# EAGLE board headstage (EAGLE 6.5.0), part 1 of 2
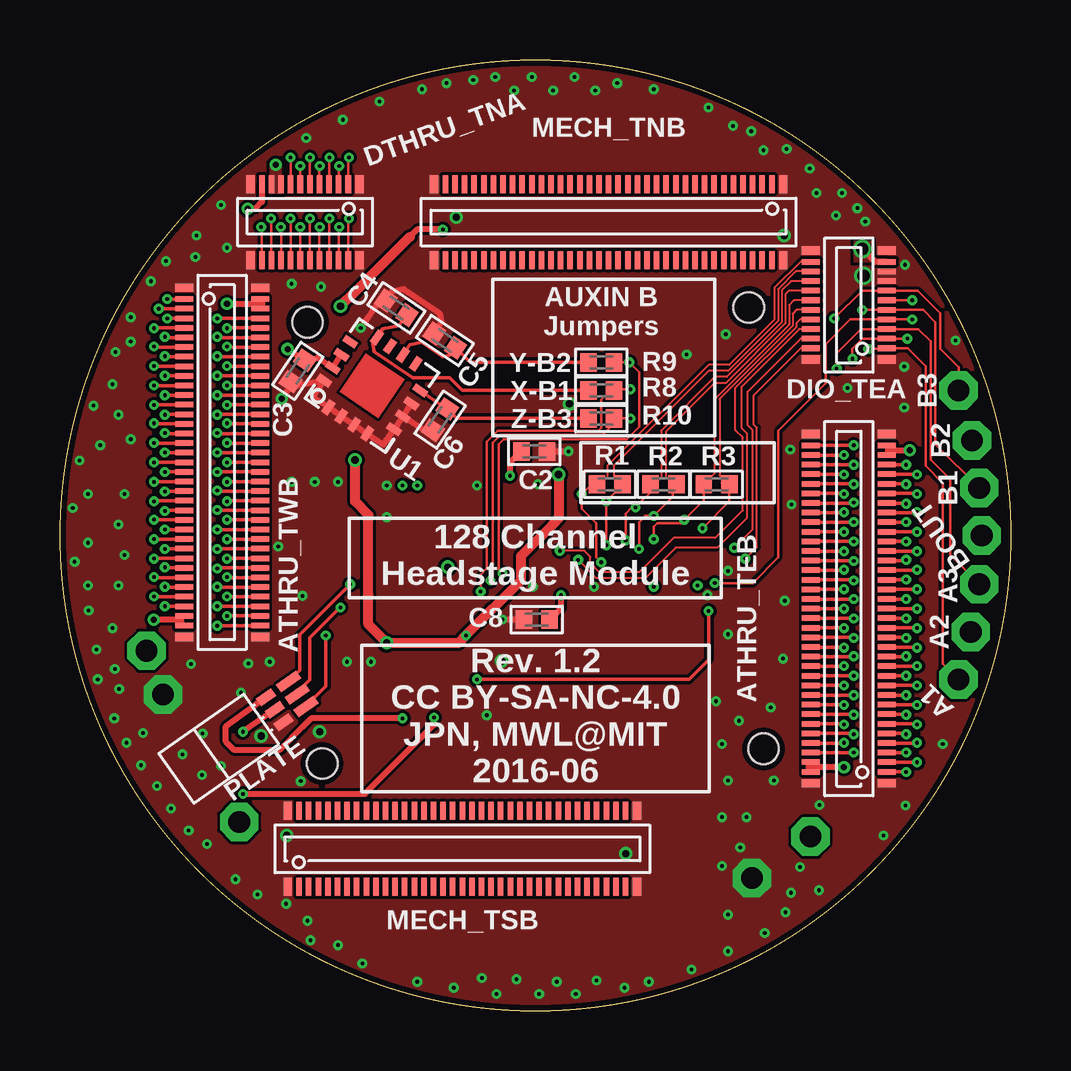
[diagram p0: board, top side]
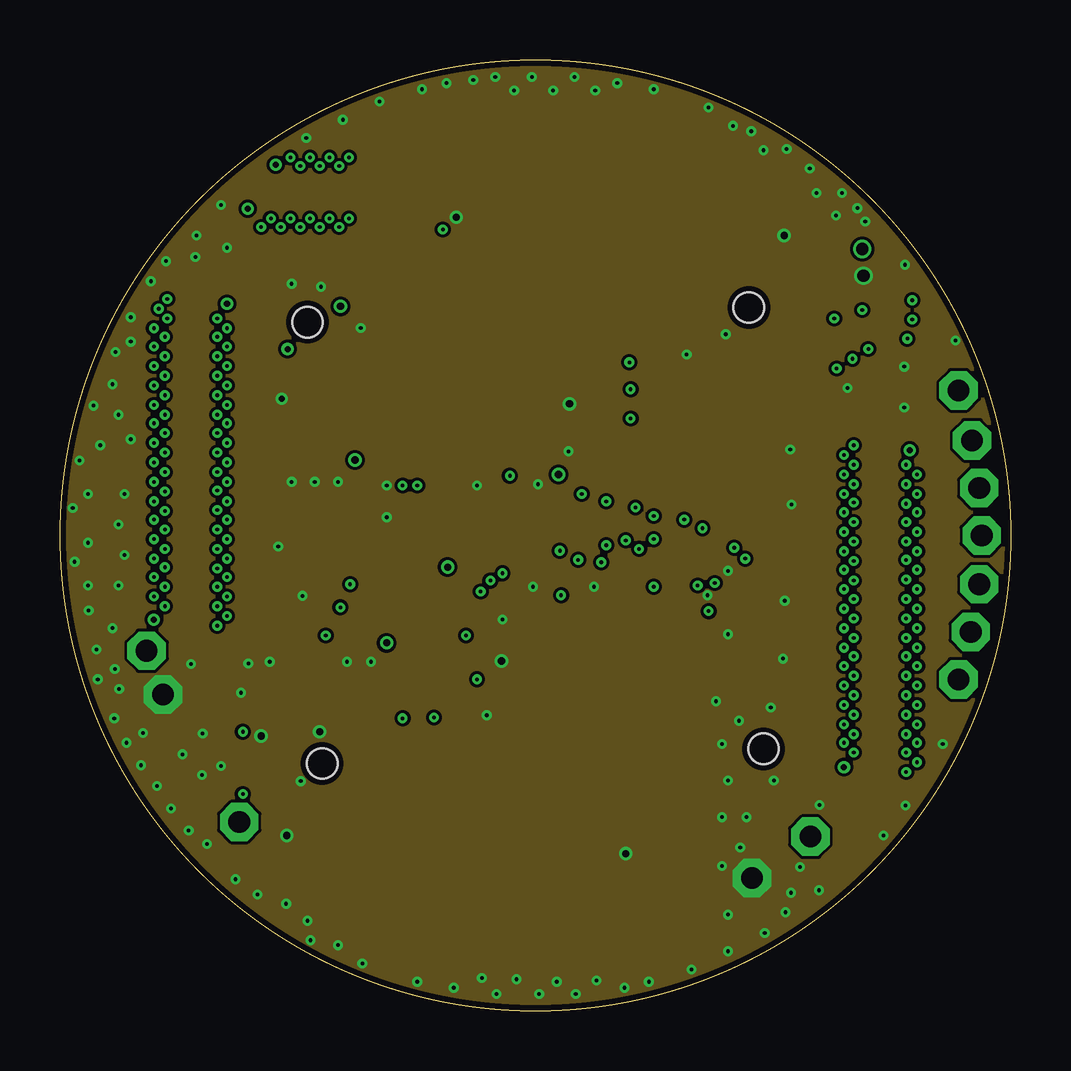
[diagram p1: board, inner layer Route2]
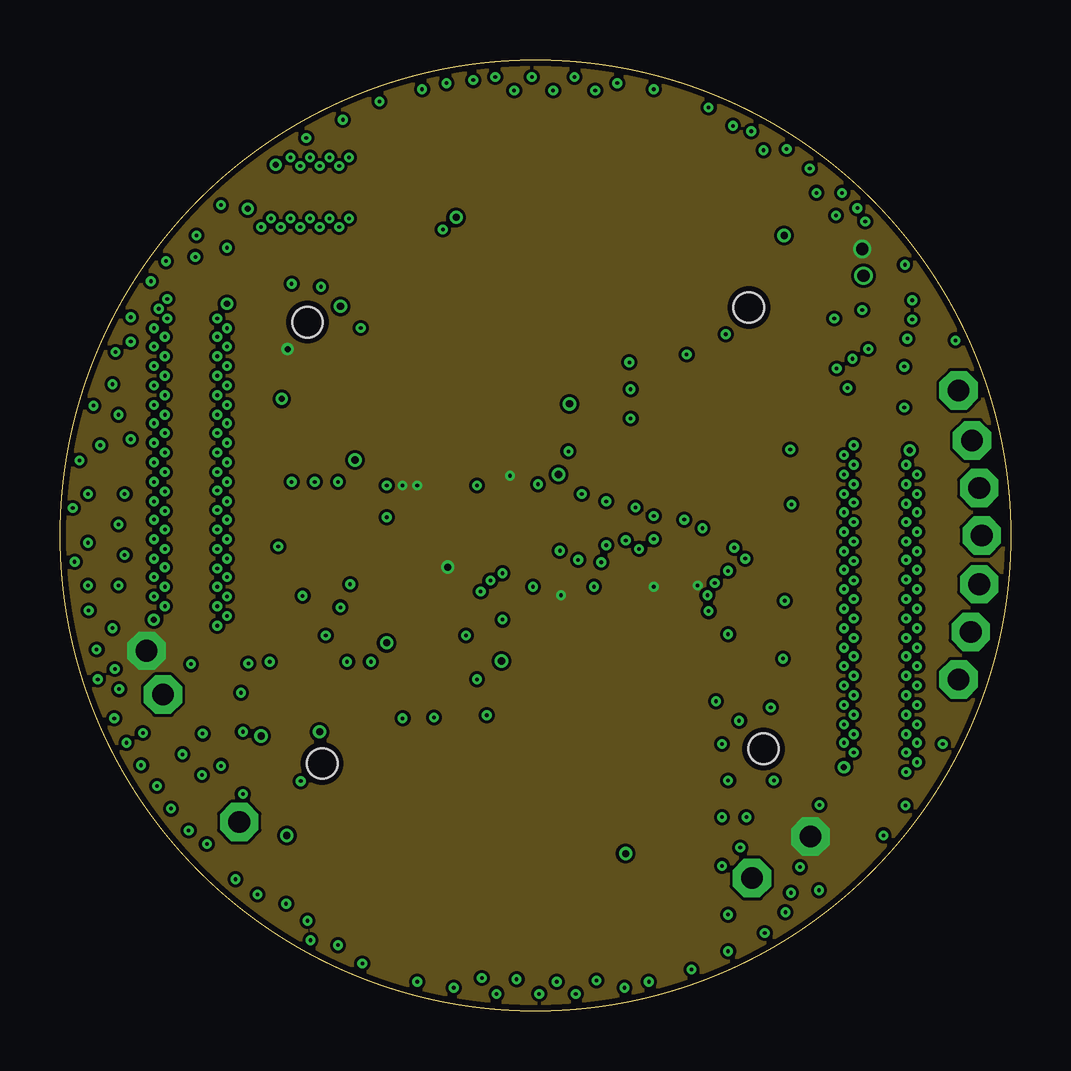
[diagram p2: board, inner layer Route3]
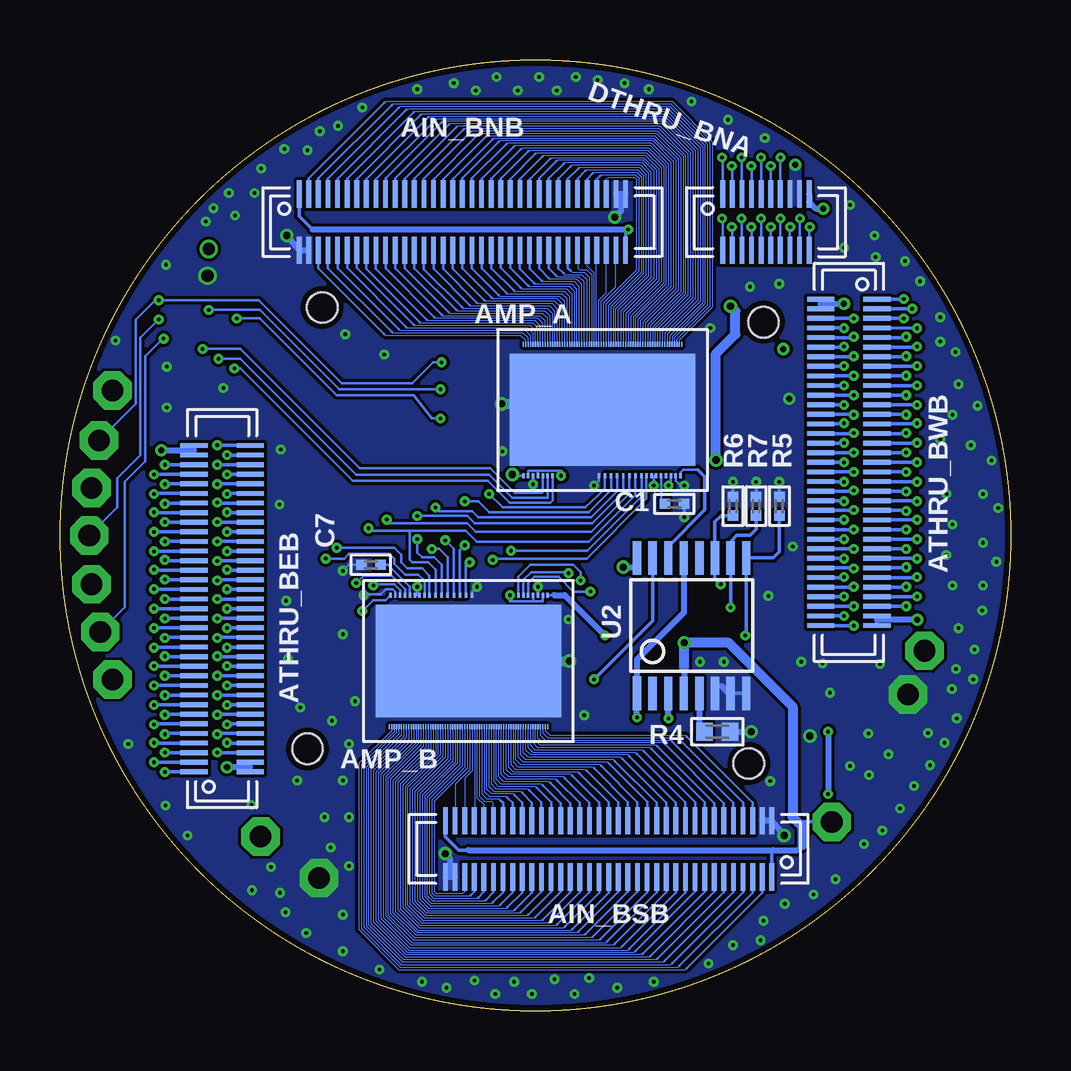
[diagram p3: board, bottom side, seen from below]

Size 39.62 x 39.62 mm. Coordinates in mm from the lower left corner, seen from the top.
Outline: circle at 19.81,19.81 radius 19.81
Copper layers (1*2+3*16): Top 0.035mm / dielectric 1.5mm / Route2 0.035mm / dielectric 0.15mm / Route3 0.035mm / dielectric 0.2mm / Bottom 0.035mm
Design rules "Precision-Image *": minimum track width 2mil, minimum drill 6mil, track to track 0.050290625mm, track to pad 0.050290625mm, pad to pad 0.050290625mm, via to via 0.050290625mm, smd to smd 0.050290625mm, copper to edge 10mil, drill to drill 15mil, minimum pad ring 5mil, minimum via ring 5mil, stop-mask expansion 2mil, vias tented up to drill 20mil, thermal gap 10mil
Net classes: 1 thick: width 0.102 mm
Holes 1.27 mm at 10.31,28.7 28.7,29.31 29.31,10.92 10.92,10.31

## Footprints (pad centres in the part's own frame; a part is rotated, then mirrored left to right if it is on the bottom)
TESTPOINT_SMALL = drill 0.9 pad 1.6 octagon: 1 0,0
DF40-70REC = smd 0.2 x 1.14: 1 -6.8,1.17; 2 -6.4,1.17; 3 -6,1.17; 4 -5.6,1.17; 5 -5.2,1.17; 6 -4.8,1.17; 7 -4.4,1.17; 8 -4,1.17; 9 -3.6,1.17; 10 -3.2,1.17; 11 -2.8,1.17; 12 -2.4,1.17; 13 -2,1.17; 14 -1.6,1.17; 15 -1.2,1.17; 16 -0.8,1.17; 17 -0.4,1.17; 18 0,1.17; 19 0.4,1.17; 20 0.8,1.17; 21 1.2,1.17; 22 1.6,1.17; 23 2,1.17; 24 2.4,1.17; 25 2.8,1.17; 26 3.2,1.17; 27 3.6,1.17; 28 4,1.17; 29 4.4,1.17; 30 4.8,1.17; 31 5.2,1.17; 32 5.6,1.17; 33 6,1.17; 34 6.4,1.17; 35 6.8,1.17; 36 6.8,-1.17; 37 6.4,-1.17; 38 6,-1.17; 39 5.6,-1.17; 40 5.2,-1.17; 41 4.8,-1.17; 42 4.4,-1.17; 43 4,-1.17; 44 3.6,-1.17; 45 3.2,-1.17; 46 2.8,-1.17; 47 2.4,-1.17; 48 2,-1.17; 49 1.6,-1.17; 50 1.2,-1.17; 51 0.8,-1.17; 52 0.4,-1.17; 53 0,-1.17; 54 -0.4,-1.17; 55 -0.8,-1.17; 56 -1.2,-1.17; 57 -1.6,-1.17; 58 -2,-1.17; 59 -2.4,-1.17; 60 -2.8,-1.17; 61 -3.2,-1.17; 62 -3.6,-1.17; 63 -4,-1.17; 64 -4.4,-1.17; 65 -4.8,-1.17; 66 -5.2,-1.17; 67 -5.6,-1.17; 68 -6,-1.17; 69 -6.4,-1.17; 70 -6.8,-1.17
RHD2164_COB = smd 0.051 x 0.203: 0 -3.2,2.743; 1 -3.099,2.743; 2 -2.997,2.743; 3 -2.896,2.743; 4 -2.794,2.743; 5 -2.692,2.743; 6 -2.591,2.743; 7 -2.489,2.743; 8 -2.388,2.743; 9 -2.286,2.743; 10 -2.184,2.743; 11 -2.083,2.743; 12 -1.981,2.743; 13 -1.88,2.743; 14 -1.778,2.743; 15 -1.676,2.743; 16 -1.575,2.743; 17 -1.473,2.743; 18 -1.372,2.743; 19 -1.27,2.743; 20 -1.168,2.743; 21 -1.067,2.743; 22 -0.965,2.743; 23 -0.864,2.743; 24 -0.762,2.743; 25 -0.66,2.743; 26 -0.559,2.743; 27 -0.457,2.743; 28 -0.356,2.743; 29 -0.254,2.743; 30 -0.152,2.743; 31 -0.051,2.743; 32 0.051,2.743; 33 0.152,2.743; 34 0.254,2.743; 35 0.356,2.743; 36 0.457,2.743; 37 0.559,2.743; 38 0.66,2.743; 39 0.762,2.743; 40 0.864,2.743; 41 0.965,2.743; 42 1.067,2.743; 43 1.168,2.743; 44 1.27,2.743; 45 1.372,2.743; 46 1.473,2.743; 47 1.575,2.743; 48 1.676,2.743; 49 1.778,2.743; 50 1.88,2.743; 51 1.981,2.743; 52 2.083,2.743; 53 2.184,2.743; 54 2.286,2.743; 55 2.388,2.743; 56 2.489,2.743; 57 2.591,2.743; 58 2.692,2.743; 59 2.794,2.743; 60 2.896,2.743; 61 2.997,2.743; 62 3.099,2.743; 63 3.2,2.743; A -3.302,2.743; B 3.302,2.743 | smd 0.102 x 0.203: B1 -3.302,-2.743; B2 -3.099,-2.743; B3 -2.896,-2.743; B4 -2.692,-2.743; B5 -2.489,-2.743; B6 -2.286,-2.743; B7 -2.083,-2.743; B8 -0.152,-2.743; B9 0.102,-2.743; B10 0.356,-2.743; B11 0.61,-2.743; B12 0.864,-2.743; B13 1.118,-2.743; B14 1.372,-2.743; B15 1.626,-2.743; B16 1.829,-2.743; B17 2.032,-2.743; B18 2.235,-2.743; B19 2.438,-2.743; B20 2.642,-2.743; B21 2.845,-2.743; B22 3.048,-2.743; B23 3.251,-2.743 | smd 7.722 x 4.674: CENTER 0,0
DF40-70HEAD = smd 0.23 x 0.75: 1 -6.8,-1.585; 2 -6.4,-1.585; 3 -6,-1.585; 4 -5.6,-1.585; 5 -5.2,-1.585; 6 -4.8,-1.585; 7 -4.4,-1.585; 8 -4,-1.585; 9 -3.6,-1.585; 10 -3.2,-1.585; 11 -2.8,-1.585; 12 -2.4,-1.585; 13 -2,-1.585; 14 -1.6,-1.585; 15 -1.2,-1.585; 16 -0.8,-1.585; 17 -0.4,-1.585; 18 0,-1.585; 19 0.4,-1.585; 20 0.8,-1.585; 21 1.2,-1.585; 22 1.6,-1.585; 23 2,-1.585; 24 2.4,-1.585; 25 2.8,-1.585; 26 3.2,-1.585; 27 3.6,-1.585; 28 4,-1.585; 29 4.4,-1.585; 30 4.8,-1.585; 31 5.2,-1.585; 32 5.6,-1.585; 33 6,-1.585; 34 6.4,-1.585; 35 6.8,-1.585; 36 6.8,1.585; 37 6.4,1.585; 38 6,1.585; 39 5.6,1.585; 40 5.2,1.585; 41 4.8,1.585; 42 4.4,1.585; 43 4,1.585; 44 3.6,1.585; 45 3.2,1.585; 46 2.8,1.585; 47 2.4,1.585; 48 2,1.585; 49 1.6,1.585; 50 1.2,1.585; 51 0.8,1.585; 52 0.4,1.585; 53 0,1.585; 54 -0.4,1.585; 55 -0.8,1.585; 56 -1.2,1.585; 57 -1.6,1.585; 58 -2,1.585; 59 -2.4,1.585; 60 -2.8,1.585; 61 -3.2,1.585; 62 -3.6,1.585; 63 -4,1.585; 64 -4.4,1.585; 65 -4.8,1.585; 66 -5.2,1.585; 67 -5.6,1.585; 68 -6,1.585; 69 -6.4,1.585; 70 -6.8,1.585 | smd 0.35 x 0.75: M1 -7.275,-1.585; M2 7.275,-1.585; M3 7.275,1.585; M4 -7.275,1.585
0201 = smd 0.432 x 0.432: 1 -0.394,0; 2 0.394,0
0402 = smd 0.686 x 0.762: 1 -0.533,0; 2 0.533,0
DF40-20HEAD = smd 0.23 x 0.75: 1 -1.8,-1.585; 2 -1.4,-1.585; 3 -1,-1.585; 4 -0.6,-1.585; 5 -0.2,-1.585; 6 0.2,-1.585; 7 0.6,-1.585; 8 1,-1.585; 9 1.4,-1.585; 10 1.8,-1.585; 11 1.8,1.585; 12 1.4,1.585; 13 1,1.585; 14 0.6,1.585; 15 0.2,1.585; 16 -0.2,1.585; 17 -0.6,1.585; 18 -1,1.585; 19 -1.4,1.585; 20 -1.8,1.585 | smd 0.35 x 0.75: M1 -2.275,-1.585; M2 2.275,-1.585; M3 2.275,1.585; M4 -2.275,1.585
DF40-20REC = smd 0.2 x 1.14: 1 -1.8,1.17; 2 -1.4,1.17; 3 -1,1.17; 4 -0.6,1.17; 5 -0.2,1.17; 6 0.2,1.17; 7 0.6,1.17; 8 1,1.17; 9 1.4,1.17; 10 1.8,1.17; 11 1.8,-1.17; 12 1.4,-1.17; 13 1,-1.17; 14 0.6,-1.17; 15 0.2,-1.17; 16 -0.2,-1.17; 17 -0.6,-1.17; 18 -1,-1.17; 19 -1.4,-1.17; 20 -1.8,-1.17
OMNETICS_PZN-06-AA = smd 0.381 x 0.762: B1 0.635,-1.016; B2 0,-1.016; B3 -0.635,-1.016 | smd 0.381 x 1.016: T1 0.635,-2.159; T2 0,-2.159; T3 -0.635,-2.159
ADXL335 = smd 0.61 x 0.305: COM1 -1.775,-0.3; NC1 -1.775,1; NC2 -1.775,-0.95; NC3 1.775,-1; NC4 1.775,0.3; ST -1.775,0.35; XOUT 1.775,0.95; YOUT 1.775,-0.35 | smd 0.305 x 0.61: COM2 -1,-1.775; COM3 -0.35,-1.775; COM4 0.3,-1.775; NC5 1,1.775; NC6 -0.95,1.775; VS1 0.35,1.775; VS2 -0.3,1.775; ZOUT 0.95,-1.775
TSSOP-16 = smd 0.348 x 1.397: 1 -2.273,-2.814; 2 -1.623,-2.815; 3 -0.973,-2.815; 4 -0.323,-2.815; 5 0.327,-2.815; 6 0.977,-2.815; 7 1.627,-2.815; 8 2.277,-2.815; 9 2.277,2.825; 10 1.627,2.825; 11 0.977,2.825; 12 0.327,2.825; 13 -0.323,2.825; 14 -0.973,2.825; 15 -1.623,2.825; 16 -2.273,2.825

## Placement (x,y rotation side)
A1  [TESTPOINT_SMALL]  37.44,13.82 0 top
A2  [TESTPOINT_SMALL]  37.95,15.8 0 top
A3  [TESTPOINT_SMALL]  38.3,17.78 0 top
AIN_BNB  DF40REC  [DF40-70REC]  22.86,32.87 0 bottom
AIN_BSB  DF40REC  [DF40-70REC]  16.76,6.76 180 bottom
AMP_A  RHD2164  [RHD2164_COB]  17.02,25.04 0 bottom
AMP_B  RHD2164  [RHD2164_COB]  22.61,14.58 180 bottom
ATHRU_BEB  DF40REC  [DF40-70REC]  32.87,16.76 90 bottom
ATHRU_BWB  DF40REC  [DF40-70REC]  6.76,22.86 270 bottom
ATHRU_TEB  DF40HEAD  [DF40-70HEAD]  32.87,16.76 90 top
ATHRU_TWB  DF40HEAD  [DF40-70HEAD]  6.76,22.86 270 top
B1  [TESTPOINT_SMALL]  38.3,21.79 0 top
B2  [TESTPOINT_SMALL]  38,23.77 0 top
B3  [TESTPOINT_SMALL]  37.44,25.86 0 top
BOUT  [TESTPOINT_SMALL]  38.4,19.81 0 top
C1  10n  [0201]  14.02,21.13 0 bottom
C2  .1uF  [0402]  19.76,23.32 0 top
C3  .1uF  [0402]  9.91,26.67 236 top
C4  .1uF  [0402]  14.02,29.3 326 top
C5  .1uF  [0402]  16.04,27.93 326 top
C6  .1uF  [0402]  15.84,24.64 56 top
C7  10n  [0201]  26.67,18.59 180 bottom
C8  .1uF  [0402]  19.86,16.31 180 top
DIO_TEA  DF40HEAD  [DF40-20HEAD]  32.87,29.41 90 top
DTHRU_BNA  DF40REC  [DF40-20REC]  10.21,32.87 0 bottom
DTHRU_TNA  DF40HEAD  [DF40-20HEAD]  10.21,32.87 180 top
GND  GND  [TESTPOINT_SMALL]  28.83,5.54 0 top
GND.  GND  [TESTPOINT_SMALL]  4.29,13.18 0 top
MECH_TNB  DF40HEAD  [DF40-70HEAD]  22.86,32.87 180 top
MECH_TSB  DF40HEAD  [DF40-70HEAD]  16.76,6.76 0 top
PLATE  PZN-06  [OMNETICS_PZN-06-AA]  8.11,11.97 125 top
R1  100  [0402]  22.91,21.95 0 top
R2  100  [0402]  25.15,21.95 0 top
R3  100  [0402]  27.36,21.95 0 top
R4  0  [0402]  12.24,11.63 180 bottom
R5  100k  [0201]  9.65,21.03 270 bottom
R6  100k  [0201]  10.62,21.03 270 bottom
R7  100k  [0201]  11.58,21.03 270 bottom
R8  0  [0402]  22.56,25.86 180 top
R9  0  [0402]  22.56,27.03 180 top
R10  0  [0402]  22.56,24.69 180 top
REF1  REF  [TESTPOINT_SMALL]  7.47,7.87 0 top
U1  ADXL335  [ADXL335]  13,26.06 56 top
U2  74HC4053  [TSSOP-16]  13.31,16.05 0 bottom
VCC1  VCC  [TESTPOINT_SMALL]  31.27,7.26 0 top
VCC2  VCC  [TESTPOINT_SMALL]  3.61,15.01 0 top

## Library data of the parts
A1-A3 AIN_BNB AIN_BSB AMP_A AMP_B ATHRU_BEB ATHRU_BWB ATHRU_TEB ATHRU_TWB B1-B3 BOUT C4-C6 DIO_TEA DTHRU_BNA DTHRU_TNA GND GND. MECH_TNB MECH_TSB PLATE R1-R3 R8-R10 REF1 U1 U2 VCC1 VCC2 = jonnew
C1 C2 C7 C8 R4-R7 = RHD2000_eval_board
C3 = headstage

## Nets
AGND_THRU_1: ATHRU_BWB.34 ATHRU_BWB.35 ATHRU_TWB.34 ATHRU_TWB.35
AGND_THRU_2: ATHRU_BWB.69 ATHRU_BWB.70 ATHRU_TWB.69 ATHRU_TWB.70
AGND_THRU_3 [thick]: ATHRU_BEB.34 ATHRU_BEB.35 ATHRU_TEB.34 ATHRU_TEB.35
AGND_THRU_4: ATHRU_BEB.69 ATHRU_BEB.70 ATHRU_TEB.69 ATHRU_TEB.70
AUXIN1_A: A1.1 AMP_A.B5 DIO_TEA.1
AUXIN1_A_THRU: DTHRU_BNA.1 DTHRU_TNA.1
AUXIN1_B: AMP_B.B5 B1.1 DIO_TEA.5 R8.1
AUXIN1_B_THRU: DTHRU_BNA.5 DTHRU_TNA.5
AUXIN2_A: A2.1 AMP_A.B6 DIO_TEA.2
AUXIN2_A_THRU: DTHRU_BNA.2 DTHRU_TNA.2
AUXIN2_B: AMP_B.B6 B2.1 DIO_TEA.6 R9.1
AUXIN2_B_THRU: DTHRU_BNA.6 DTHRU_TNA.6
AUXIN3_A: A3.1 AMP_A.B7 DIO_TEA.3
AUXIN3_A_THRU: DTHRU_BNA.3 DTHRU_TNA.3
AUXIN3_B: AMP_B.B7 B3.1 DIO_TEA.7 R10.1
AUXIN3_B_THRU: DTHRU_BNA.7 DTHRU_TNA.7
AUXOUT_B: AMP_B.B20 BOUT.1 DIO_TEA.4
AUXOUT_B_THRU: DTHRU_BNA.4 DTHRU_TNA.4
BATH [thick]: PLATE.B1 U2.3
CS+: AMP_A.B10 AMP_B.B10 DIO_TEA.12 R1.2
CS+_THRU: DTHRU_BNA.12 DTHRU_TNA.12
CS-: AMP_A.B9 AMP_B.B9 DIO_TEA.11 R1.1
CS-_THRU: DTHRU_BNA.11 DTHRU_TNA.11
ELEC_TEST1: AMP_A.B23 U2.14
ELEC_TEST2: AMP_B.B23 U2.15
GND [thick]: AIN_BNB.34 AIN_BNB.35 AIN_BNB.69 AIN_BNB.70 AIN_BSB.34 AIN_BSB.35 AIN_BSB.69 AIN_BSB.70 AMP_A.B3 AMP_A.B8 AMP_A.B22 AMP_A.CENTER AMP_B.B3 AMP_B.B8 AMP_B.B22 AMP_B.CENTER ATHRU_TEB.M1 ATHRU_TEB.M2 ATHRU_TEB.M3 ATHRU_TEB.M4 ATHRU_TWB.M1 ATHRU_TWB.M2 ATHRU_TWB.M3 ATHRU_TWB.M4 C1.2 C2.2 C3.2 C4.1 C5.1 C6.1 C7.2 C8.2 DIO_TEA.8 DIO_TEA.9 DIO_TEA.M1 DIO_TEA.M2 DIO_TEA.M3 DIO_TEA.M4 DTHRU_TNA.M1 DTHRU_TNA.M2 DTHRU_TNA.M3 DTHRU_TNA.M4 GND.1 GND..1 MECH_TNB.M1 MECH_TNB.M2 MECH_TNB.M3 MECH_TNB.M4 MECH_TSB.M1 MECH_TSB.M2 MECH_TSB.M3 MECH_TSB.M4 PLATE.B3 R4.1 R5.1 R6.1 R7.1 U1.COM1 U1.COM2 U1.COM3 U1.COM4 U1.NC1 U1.NC2 U1.NC6 U1.ST U2.6 U2.7 U2.8
GND_THRU: DTHRU_BNA.8 DTHRU_BNA.9 DTHRU_TNA.8 DTHRU_TNA.9
MISO1+: AMP_A.B16 DIO_TEA.18
MISO1+_THRU: DTHRU_BNA.18 DTHRU_TNA.18
MISO1-: AMP_A.B15 DIO_TEA.17
MISO1-_THRU: DTHRU_BNA.17 DTHRU_TNA.17
MISO2+: AMP_B.B16 DIO_TEA.20
MISO2+_THRU: DTHRU_BNA.20 DTHRU_TNA.20
MISO2-: AMP_B.B15 DIO_TEA.19
MISO2-_THRU: DTHRU_BNA.19 DTHRU_TNA.19
MOSI+: AMP_A.B14 AMP_B.B14 DIO_TEA.16 R3.2
MOSI+_THRU: DTHRU_BNA.16 DTHRU_TNA.16
MOSI-: AMP_A.B13 AMP_B.B13 DIO_TEA.15 R3.1
MOSI-_THRU: DTHRU_BNA.15 DTHRU_TNA.15
N$1 [thick]: AMP_B.B19 C7.1
N$2: AIN_BNB.38 AMP_A.30
N$3: AIN_BNB.39 AMP_A.29
N$4: AIN_BNB.40 AMP_A.28
N$5: AIN_BNB.41 AMP_A.27
N$6: AIN_BNB.42 AMP_A.26
N$7: AIN_BNB.32 AMP_A.33
N$8: AIN_BNB.31 AMP_A.34
N$9: AIN_BNB.30 AMP_A.35
N$10: AIN_BNB.29 AMP_A.36
N$11: AIN_BSB.38 AMP_B.30
N$12: AIN_BNB.28 AMP_A.37
N$13: AIN_BNB.27 AMP_A.38
N$14: AIN_BNB.26 AMP_A.39
N$15: AIN_BNB.25 AMP_A.40
N$16: AIN_BNB.24 AMP_A.41
N$17: AIN_BNB.23 AMP_A.42
N$18: AIN_BNB.22 AMP_A.43
N$19: AIN_BNB.21 AMP_A.44
N$20: AIN_BNB.20 AMP_A.45
N$21: AIN_BNB.19 AMP_A.46
N$22: AIN_BNB.18 AMP_A.47
N$23: AIN_BNB.17 AMP_A.48
N$24: AIN_BNB.16 AMP_A.49
N$25: AIN_BNB.15 AMP_A.50
N$26: AIN_BNB.14 AMP_A.51
N$27: AIN_BNB.13 AMP_A.52
N$28: AIN_BNB.12 AMP_A.53
N$29: AIN_BNB.11 AMP_A.54
N$30: AIN_BNB.10 AMP_A.55
N$31: AIN_BNB.9 AMP_A.56
N$32: AIN_BNB.8 AMP_A.57
N$33: AIN_BNB.7 AMP_A.58
N$34: AIN_BNB.6 AMP_A.59
N$35: AIN_BSB.39 AMP_B.29
N$36: AIN_BSB.40 AMP_B.28
N$37: AIN_BSB.41 AMP_B.27
N$38: AIN_BSB.42 AMP_B.26
N$39: AIN_BSB.43 AMP_B.25
N$40: AIN_BSB.44 AMP_B.24
N$41: AIN_BNB.5 AMP_A.60
N$42 [thick]: AMP_A.B19 C1.1
N$43: AIN_BNB.4 AMP_A.61
N$44: AIN_BNB.3 AMP_A.62
N$45: AIN_BNB.2 AMP_A.63
N$46: AIN_BNB.33 AMP_A.32
N$47: AIN_BSB.45 AMP_B.23
N$48: AIN_BSB.46 AMP_B.22
N$49: AIN_BSB.47 AMP_B.21
N$50: AIN_BSB.48 AMP_B.20
N$51: AIN_BSB.49 AMP_B.19
N$52: AIN_BSB.50 AMP_B.18
N$53: AIN_BSB.51 AMP_B.17
N$54: AIN_BSB.52 AMP_B.16
N$55: AIN_BSB.53 AMP_B.15
N$56: AIN_BSB.54 AMP_B.14
N$57: AIN_BSB.55 AMP_B.13
N$58: AIN_BSB.56 AMP_B.12
N$59: AIN_BSB.57 AMP_B.11
N$60: AIN_BSB.58 AMP_B.10
N$61: AIN_BSB.59 AMP_B.9
N$62: AIN_BSB.60 AMP_B.8
N$63: AIN_BSB.61 AMP_B.7
N$64: AIN_BSB.62 AMP_B.6
N$65: AIN_BSB.63 AMP_B.5
N$66: AIN_BSB.64 AMP_B.4
N$67: AIN_BSB.65 AMP_B.3
N$68: AIN_BSB.66 AMP_B.2
N$69: AIN_BSB.67 AMP_B.1
N$70: AIN_BNB.43 AMP_A.25
N$71: AIN_BNB.44 AMP_A.24
N$72: AIN_BNB.45 AMP_A.23
N$73: AIN_BNB.46 AMP_A.22
N$74: AIN_BSB.68 AMP_B.0
N$75: AIN_BSB.37 AMP_B.31
N$76: AIN_BSB.32 AMP_B.33
N$77: AIN_BSB.31 AMP_B.34
N$78: AIN_BSB.30 AMP_B.35
N$79: AIN_BSB.29 AMP_B.36
N$80: AIN_BSB.28 AMP_B.37
N$81: AIN_BSB.27 AMP_B.38
N$82: AIN_BSB.26 AMP_B.39
N$83: AIN_BSB.25 AMP_B.40
N$84: AIN_BSB.24 AMP_B.41
N$85: AIN_BSB.23 AMP_B.42
N$86: AIN_BSB.22 AMP_B.43
N$87: AIN_BSB.21 AMP_B.44
N$88: AIN_BSB.20 AMP_B.45
N$89: AIN_BSB.19 AMP_B.46
N$90: AIN_BSB.18 AMP_B.47
N$91: AIN_BSB.17 AMP_B.48
N$92: AIN_BSB.16 AMP_B.49
N$93: AIN_BSB.15 AMP_B.50
N$94: AIN_BSB.14 AMP_B.51
N$95: AIN_BSB.13 AMP_B.52
N$96: AIN_BSB.12 AMP_B.53
N$97: AIN_BSB.11 AMP_B.54
N$98: AIN_BSB.10 AMP_B.55
N$99: AIN_BSB.9 AMP_B.56
N$100: AIN_BSB.8 AMP_B.57
N$101: AIN_BSB.7 AMP_B.58
N$102: AIN_BSB.6 AMP_B.59
N$103: AIN_BSB.5 AMP_B.60
N$104: AIN_BSB.4 AMP_B.61
N$105: AIN_BSB.3 AMP_B.62
N$106: AIN_BSB.2 AMP_B.63
N$107: AIN_BSB.33 AMP_B.32
N$108: ATHRU_BEB.33 ATHRU_TEB.33
N$109: ATHRU_BEB.32 ATHRU_TEB.32
N$110: ATHRU_BEB.31 ATHRU_TEB.31
N$111: ATHRU_BEB.30 ATHRU_TEB.30
N$112: ATHRU_BEB.29 ATHRU_TEB.29
N$113: ATHRU_BEB.28 ATHRU_TEB.28
N$114: ATHRU_BEB.27 ATHRU_TEB.27
N$115: ATHRU_BEB.26 ATHRU_TEB.26
N$116: ATHRU_BEB.25 ATHRU_TEB.25
N$117: ATHRU_BEB.24 ATHRU_TEB.24
N$118: ATHRU_BEB.23 ATHRU_TEB.23
N$119: ATHRU_BEB.22 ATHRU_TEB.22
N$120: ATHRU_BEB.21 ATHRU_TEB.21
N$121: ATHRU_BEB.20 ATHRU_TEB.20
N$122: ATHRU_BEB.19 ATHRU_TEB.19
N$123: ATHRU_BEB.18 ATHRU_TEB.18
N$124: ATHRU_BEB.17 ATHRU_TEB.17
N$125: ATHRU_BEB.16 ATHRU_TEB.16
N$126: ATHRU_BEB.15 ATHRU_TEB.15
N$127: ATHRU_BEB.14 ATHRU_TEB.14
N$128: ATHRU_BEB.13 ATHRU_TEB.13
N$129: ATHRU_BEB.12 ATHRU_TEB.12
N$130: ATHRU_BEB.11 ATHRU_TEB.11
N$131: PLATE.T1 R7.2 U2.11
N$132: PLATE.T2 R6.2 U2.10
N$133: PLATE.T3 R5.2 U2.9
N$134 [thick]: R4.2 U2.5
N$136: PLATE.B2 U2.1 U2.13
N$137: AIN_BNB.47 AMP_A.21
N$138: AIN_BNB.48 AMP_A.20
N$139: AIN_BNB.49 AMP_A.19
N$140: AIN_BNB.50 AMP_A.18
N$141: AIN_BNB.51 AMP_A.17
N$142: AIN_BNB.52 AMP_A.16
N$143: AIN_BNB.53 AMP_A.15
N$144: AIN_BNB.54 AMP_A.14
N$145: AIN_BNB.55 AMP_A.13
N$146: AIN_BNB.56 AMP_A.12
N$147: AIN_BNB.57 AMP_A.11
N$148: AIN_BNB.58 AMP_A.10
N$149: AIN_BNB.59 AMP_A.9
N$150: AIN_BNB.60 AMP_A.8
N$151: AIN_BNB.61 AMP_A.7
N$152: AIN_BNB.62 AMP_A.6
N$153: AIN_BNB.63 AMP_A.5
N$154: AIN_BNB.64 AMP_A.4
N$155: AIN_BNB.65 AMP_A.3
N$156: AIN_BNB.66 AMP_A.2
N$157: ATHRU_BEB.10 ATHRU_TEB.10
N$158: ATHRU_BEB.9 ATHRU_TEB.9
N$159: ATHRU_BEB.8 ATHRU_TEB.8
N$160: ATHRU_BEB.7 ATHRU_TEB.7
N$161: ATHRU_BEB.6 ATHRU_TEB.6
N$162: AIN_BNB.37 AMP_A.31
N$163: ATHRU_BEB.5 ATHRU_TEB.5
N$164: ATHRU_BEB.4 ATHRU_TEB.4
N$165: ATHRU_BEB.3 ATHRU_TEB.3
N$166: ATHRU_BEB.2 ATHRU_TEB.2
N$167: ATHRU_BEB.38 ATHRU_TEB.38
N$168: ATHRU_BEB.39 ATHRU_TEB.39
N$169: ATHRU_BEB.40 ATHRU_TEB.40
N$170: ATHRU_BEB.41 ATHRU_TEB.41
N$171: ATHRU_BEB.42 ATHRU_TEB.42
N$172: ATHRU_BEB.43 ATHRU_TEB.43
N$173: ATHRU_BEB.44 ATHRU_TEB.44
N$174: ATHRU_BEB.45 ATHRU_TEB.45
N$175: ATHRU_BEB.46 ATHRU_TEB.46
N$176: ATHRU_BEB.47 ATHRU_TEB.47
N$177: ATHRU_BEB.48 ATHRU_TEB.48
N$178: ATHRU_BEB.49 ATHRU_TEB.49
N$179: ATHRU_BEB.50 ATHRU_TEB.50
N$180: ATHRU_BEB.51 ATHRU_TEB.51
N$181: ATHRU_BEB.52 ATHRU_TEB.52
N$182: ATHRU_BEB.53 ATHRU_TEB.53
N$183: ATHRU_BEB.54 ATHRU_TEB.54
N$184: ATHRU_BEB.55 ATHRU_TEB.55
N$185: ATHRU_BEB.56 ATHRU_TEB.56
N$186: ATHRU_BEB.57 ATHRU_TEB.57
N$187: ATHRU_BEB.58 ATHRU_TEB.58
N$188: ATHRU_BEB.59 ATHRU_TEB.59
N$189: ATHRU_BEB.60 ATHRU_TEB.60
N$190: ATHRU_BEB.61 ATHRU_TEB.61
N$191: ATHRU_BEB.62 ATHRU_TEB.62
N$192: ATHRU_BEB.63 ATHRU_TEB.63
N$193: ATHRU_BEB.64 ATHRU_TEB.64
N$194: ATHRU_BEB.65 ATHRU_TEB.65
N$195: ATHRU_BEB.66 ATHRU_TEB.66
N$196: ATHRU_BEB.67 ATHRU_TEB.67
N$197: ATHRU_BEB.68 ATHRU_TEB.68
N$199: ATHRU_BWB.33 ATHRU_TWB.33
N$200: ATHRU_BWB.32 ATHRU_TWB.32
N$201: ATHRU_BWB.31 ATHRU_TWB.31
N$202: ATHRU_BWB.30 ATHRU_TWB.30
N$203: ATHRU_BWB.29 ATHRU_TWB.29
N$204: ATHRU_BWB.28 ATHRU_TWB.28
N$205: ATHRU_BWB.27 ATHRU_TWB.27
N$206: ATHRU_BWB.26 ATHRU_TWB.26
N$207: ATHRU_BWB.25 ATHRU_TWB.25
N$208: ATHRU_BWB.24 ATHRU_TWB.24
N$209: ATHRU_BWB.23 ATHRU_TWB.23
N$210: ATHRU_BWB.22 ATHRU_TWB.22
N$211: ATHRU_BWB.21 ATHRU_TWB.21
N$212: ATHRU_BWB.20 ATHRU_TWB.20
N$213: ATHRU_BWB.19 ATHRU_TWB.19
N$214: ATHRU_BWB.18 ATHRU_TWB.18
N$215: ATHRU_BWB.17 ATHRU_TWB.17
N$216: ATHRU_BWB.16 ATHRU_TWB.16
N$217: ATHRU_BWB.15 ATHRU_TWB.15
N$218: ATHRU_BWB.14 ATHRU_TWB.14
N$219: ATHRU_BWB.13 ATHRU_TWB.13
N$220: ATHRU_BWB.12 ATHRU_TWB.12
N$221: ATHRU_BWB.11 ATHRU_TWB.11
N$222: ATHRU_BWB.10 ATHRU_TWB.10
N$223: ATHRU_BWB.9 ATHRU_TWB.9
N$224: ATHRU_BWB.8 ATHRU_TWB.8
N$225: ATHRU_BWB.7 ATHRU_TWB.7
N$226: ATHRU_BWB.6 ATHRU_TWB.6
N$227: ATHRU_BWB.5 ATHRU_TWB.5
N$228: ATHRU_BWB.4 ATHRU_TWB.4
N$229: ATHRU_BWB.3 ATHRU_TWB.3
N$230: ATHRU_BWB.2 ATHRU_TWB.2
N$231: ATHRU_BWB.38 ATHRU_TWB.38
N$232: ATHRU_BWB.39 ATHRU_TWB.39
N$233: ATHRU_BWB.40 ATHRU_TWB.40
N$234: ATHRU_BWB.41 ATHRU_TWB.41
N$235: ATHRU_BWB.42 ATHRU_TWB.42
N$236: ATHRU_BWB.43 ATHRU_TWB.43
N$237: ATHRU_BWB.44 ATHRU_TWB.44
N$238: ATHRU_BWB.45 ATHRU_TWB.45
N$239: ATHRU_BWB.46 ATHRU_TWB.46
N$240: ATHRU_BWB.47 ATHRU_TWB.47
N$241: ATHRU_BWB.48 ATHRU_TWB.48
N$242: ATHRU_BWB.49 ATHRU_TWB.49
N$243: ATHRU_BWB.50 ATHRU_TWB.50
N$244: ATHRU_BWB.51 ATHRU_TWB.51
N$245: ATHRU_BWB.52 ATHRU_TWB.52
N$246: ATHRU_BWB.53 ATHRU_TWB.53
N$247: ATHRU_BWB.54 ATHRU_TWB.54
N$248: ATHRU_BWB.55 ATHRU_TWB.55
N$249: ATHRU_BWB.56 ATHRU_TWB.56
N$250: ATHRU_BWB.57 ATHRU_TWB.57
N$251: ATHRU_BWB.58 ATHRU_TWB.58
N$252: ATHRU_BWB.59 ATHRU_TWB.59
N$253: ATHRU_BWB.60 ATHRU_TWB.60
N$254: ATHRU_BWB.61 ATHRU_TWB.61
N$255: ATHRU_BWB.62 ATHRU_TWB.62
N$256: ATHRU_BWB.63 ATHRU_TWB.63
N$257: ATHRU_BWB.64 ATHRU_TWB.64
N$258: ATHRU_BWB.65 ATHRU_TWB.65
N$259: ATHRU_BWB.66 ATHRU_TWB.66
N$260: ATHRU_BWB.67 ATHRU_TWB.67
N$261: ATHRU_BWB.68 ATHRU_TWB.68
N$262: ATHRU_BEB.37 ATHRU_TEB.37
N$450: AIN_BNB.68 AMP_A.0
N$451: AIN_BNB.67 AMP_A.1
N$1000: ATHRU_BWB.37 ATHRU_TWB.37
REF: AIN_BNB.1 AIN_BNB.36 AIN_BSB.1 AIN_BSB.36 AMP_A.B1 AMP_B.B1 REF1.1 U2.4
REF_THRU_1: ATHRU_BWB.36 ATHRU_TWB.36
REF_THRU_2: ATHRU_BWB.1 ATHRU_TWB.1
REF_THRU_3: ATHRU_BEB.36 ATHRU_TEB.36
REF_THRU_4: ATHRU_BEB.1 ATHRU_TEB.1
SCLK+: AMP_A.B12 AMP_B.B12 DIO_TEA.14 R2.2
SCLK+_THRU: DTHRU_BNA.14 DTHRU_TNA.14
SCLK-: AMP_A.B11 AMP_B.B11 DIO_TEA.13 R2.1
SCLK-_THRU: DTHRU_BNA.13 DTHRU_TNA.13
VCC [thick]: AMP_A.B2 AMP_A.B4 AMP_A.B17 AMP_A.B18 AMP_A.B21 AMP_B.B2 AMP_B.B4 AMP_B.B17 AMP_B.B18 AMP_B.B21 C2.1 C3.1 C8.1 DIO_TEA.10 U1.VS1 U1.VS2 U2.16 VCC1.1 VCC2.1
VCC_THRU: DTHRU_BNA.10 DTHRU_TNA.10
XOUT1: C4.2 R8.2 U1.XOUT
YOUT1: C5.2 R9.2 U1.YOUT
ZOUT1: C6.2 R10.2 U1.ZOUT

## Tracks (layer width: path | path; a pad name or v marks a point on that pad's centre or on a via)
AGND_THRU_1  (via drill 0.25)
  Top 0.152: 5.07,16.31 ATHRU_TWB.34 | 5.04,16.31 5.07,16.31 | 5.07,16.31 ATHRU_TWB.35
  Top 0.254: 5.04,16.31 v3.91,16.31
  Bottom 0.152: ATHRU_BWB.35 ATHRU_BWB.34 5.59,16.31
  Bottom 0.254: v3.91,16.31 5.59,16.31
AGND_THRU_2  (via drill 0.25)
  Top 0.152: ATHRU_TWB.70 ATHRU_TWB.69 8.44,29.46
  Top 0.254: v6.96,29.46 8.44,29.46
  Bottom 0.152: ATHRU_BWB.70 ATHRU_BWB.69 7.93,29.46
  Bottom 0.254: 7.93,29.46 v6.96,29.46
AGND_THRU_3  (via drill 0.25)
  Top 0.152: ATHRU_TEB.34 ATHRU_TEB.35 34.55,23.37
  Top 0.254: 34.55,23.37 v35.41,23.37
  Bottom 0.152: ATHRU_BEB.35 ATHRU_BEB.34 34.04,23.37
  Bottom 0.254: v35.41,23.37 34.04,23.37
AGND_THRU_4  (via drill 0.25)
  Top 0.152: ATHRU_TEB.70 ATHRU_TEB.69 31.18,10.16
  Top 0.254: v32.66,10.16 31.18,10.16
  Bottom 0.152: ATHRU_BEB.70 ATHRU_BEB.69 31.7,10.16
  Bottom 0.254: 31.7,10.16 v32.66,10.16
AUXIN1_A  (via drill 0.15)
  Top 0.102: A1.1 36.78,14.48 36.78,22 36.07,22.71 36.07,26.87 35.33,27.61 DIO_TEA.1 34.42,27.58 v33.68,27.58
  Bottom 0.102: AMP_A.B5 19.51,21.64 19.56,21.59 20.68,21.59 21.69,22.61 27.13,22.61 32.11,27.58 v33.68,27.58
AUXIN1_A_THRU  (via drill 0.15)
  Top 0.102: DTHRU_TNA.1 12.01,35.56 v12.04,35.56
  Bottom 0.102: DTHRU_BNA.1 12.01,35.56 v12.04,35.56
AUXIN1_B  (via drill 0.15)
  Top 0.102: B1.1 36.47,23.62 36.47,28.71 35.97,29.21 DIO_TEA.5 v33.43,29.21 | 23.05,25.96 R8.1 | v23.77,25.91 23,25.91 R8.1 | v17.53,17.48 17.53,18.19 17.78,18.44 17.78,23.72 18.24,24.18 22.43,24.18 22.55,24.31 22.55,25.46 22.95,25.86 R8.1
  Bottom 0.102: v17.53,17.48 18.24,17.48 18.85,18.09 19.86,18.09 20.12,17.83 AMP_B.B5 | AMP_B.B5 | v33.43,29.21 31.29,29.21 27.99,25.91 v23.77,25.91
AUXIN1_B_THRU  (via drill 0.15)
  Top 0.102: DTHRU_TNA.5 v10.41,35.56
  Bottom 0.102: DTHRU_BNA.5 v10.41,35.56
AUXIN2_A  (via drill 0.15)
  Top 0.102: DIO_TEA.2 v35.31,28.01 | 34.43,27.99 DIO_TEA.2 | v33.02,27.18 33.02,27.6 33.43,28.01 DIO_TEA.2
  Bottom 0.102: v35.31,28.01 35.33,28.01 36.07,27.28 36.07,22.91 36.93,22.05 36.93,16.82 A2.1 | AMP_A.B6 19.3,21.54 19.3,21.39 20.78,21.39 21.74,22.35 27.28,22.35 32.11,27.18 v33.02,27.18
AUXIN2_A_THRU  (via drill 0.15)
  Top 0.102: DTHRU_TNA.2 11.61,35.2 v11.63,35.2
  Bottom 0.102: DTHRU_BNA.2 11.61,35.2 v11.63,35.2
AUXIN2_B  (via drill 0.15)
  Top 0.102: R9.1 22.95,27.03 v23.72,27.03 24.13,26.62 24.13,24.35 23.61,23.83 18.49,23.83 18.29,23.62 18.29,18.39 v18.44,18.24 | DIO_TEA.6 v35.51,29.61 v35.51,29.62
  Top 0.152: R9.1 22.96,27.03
  Bottom 0.102: AMP_B.B6 20.32,17.96 20,18.29 18.44,18.29 v18.44,18.24 | B2.1 36.47,25.3 36.47,28.8 35.66,29.61 v35.51,29.61 v35.51,29.62 | v23.72,27.03 24.08,27.03 24.94,26.16 27.89,26.16 31.34,29.62 v35.51,29.62 | v35.51,29.62 35.61,29.62 35.61,29.61
AUXIN2_B_THRU  (via drill 0.15)
  Top 0.102: v10.01,35.2 DTHRU_TNA.6
  Bottom 0.102: DTHRU_BNA.6 v10.01,35.2
AUXIN3_A  (via drill 0.15)
  Top 0.102: A3.1 37.08,19 37.08,22.15 36.27,22.96 36.27,27.91 35.76,28.41 DIO_TEA.3 33.37,28.41 32.36,27.4 v32.36,26.77
  Bottom 0.102: AMP_A.B7 19.1,21.29 19.2,21.18 20.88,21.18 21.79,22.1 27.43,22.1 32.11,26.77 v32.36,26.77
AUXIN3_A_THRU  (via drill 0.15)
  Top 0.102: DTHRU_TNA.3 11.21,35.56 v11.23,35.56
  Bottom 0.102: DTHRU_BNA.3 11.21,35.56 v11.23,35.56
AUXIN3_B  (via drill 0.15)
  Top 0.102: B3.1 37.44,26.82 36.68,27.58 36.68,29.07 35.73,30.01 DIO_TEA.7 33.42,30.01 v32.26,28.85 | v23.77,24.69 22.95,24.69 R10.1 22.95,24.44 22.95,24.35 22.61,24 18.36,24 18.03,23.67 18.03,18.03 v17.93,17.93
  Bottom 0.102: v17.93,17.93 17.93,18.29 18.24,18.59 20.02,18.59 20.52,18.09 AMP_B.B7 | AMP_B.B7 | v32.26,28.85 31.29,28.85 28.09,25.65 24.89,25.65 24.13,24.69 v23.77,24.69
AUXIN3_B_THRU  (via drill 0.15)
  Top 0.102: DTHRU_TNA.7 v9.61,35.56 v9.6,35.56
  Bottom 0.102: DTHRU_BNA.7 v9.61,35.56 v9.6,35.56
AUXOUT_B  (via drill 0.15)
  Top 0.102: v27.28,17.83 28.85,17.83 29.92,18.9 29.92,24.18 31.9,26.16 31.9,27.79 32.93,28.81 33.84,28.81 DIO_TEA.4 v35.51,28.81
  Bottom 0.102: v27.28,17.83 26.98,18.14 25.81,18.14 25.25,17.58 AMP_B.B20 | BOUT.1 37.24,20.98 37.24,22.2 36.27,23.17 36.27,28.05 v35.51,28.81
AUXOUT_B_THRU  (via drill 0.15)
  Top 0.102: DTHRU_TNA.4 v10.81,35.2 v10.82,35.2
  Bottom 0.102: DTHRU_BNA.4 v10.81,35.2 v10.82,35.2
BATH  (via drill 0.15)
  Top 0.254: v14.28,12.19 10.47,12.19 10.11,11.83 9.15,10.87 7.26,10.87 6.91,11.23 6.91,11.86 PLATE.B1
  Bottom 0.254: v14.28,12.19 v14.28,12.2 U2.3
CS+  (via drill 0.15)
  Top 0.076: DIO_TEA.12 30.66,30.81 29.92,30.07 29.92,28.75 27.84,26.67 27.13,26.67 27.03,26.67 23.06,22.71 23.06,22.24 23.36,21.95 R1.2 | 23.32,21.95 R1.2 | 23.3,22 R1.2
  Top 0.102: v22.76,19.41 v22.76,21.23 23.32,21.79 23.32,21.93
  Top 0.406: 23.32,21.93 23.3,21.93 R1.2
  Bottom 0.102: AMP_A.B10 16.66,21.71 17.6,20.78 21.74,20.78 22.2,21.23 v22.76,21.23 | v22.76,19.41 22.96,19.2 AMP_B.B10
CS+_THRU  (via drill 0.15)
  Top 0.102: DTHRU_TNA.12 8.81,33 v8.79,33.02
  Bottom 0.051: 8.79,31.7 DTHRU_BNA.12
  Bottom 0.102: DTHRU_BNA.12 8.81,33 v8.79,33.02
CS-  (via drill 0.15)
  Top 0.076: DIO_TEA.11 30.86,31.21 29.77,30.12 29.77,28.8 27.89,26.92 27.03,26.92 22.81,22.71 22.81,22.24 22.52,21.95 R1.1 22.3,21.95
  Top 0.102: v22.55,18.69 22.35,18.9 22.35,20.32 21.74,20.93 v21.74,21.54 22.15,21.95 22.3,21.95
  Bottom 0.102: 21.69,21.49 v21.74,21.54 21.18,20.98 17.73,20.98 16.92,21.74 AMP_A.B9 | v22.55,18.69 22.71,18.69 AMP_B.B9
CS-_THRU  (via drill 0.15)
  Top 0.051: 8.38,31.18 DTHRU_TNA.11
  Top 0.102: DTHRU_TNA.11 8.41,32.64 v8.38,32.66
  Bottom 0.102: DTHRU_BNA.11 8.41,32.64 v8.38,32.66
ELEC_TEST1
  Bottom 0.102: AMP_A.B23 13.77,22.45 13.67,22.55 13.06,22.55 | 14.28,19.35 U2.14
  Bottom 0.152: 13.06,22.55 12.75,22.25 12.75,20.88 14.28,19.35
ELEC_TEST2  (via drill 0.15)
  Top 0.152: v17.37,13.82 26.21,13.82 27.03,14.63 v27.03,16.66
  Bottom 0.102: v27.03,16.66 26.57,17.12 26.06,17.12 AMP_B.B23
  Bottom 0.152: U2.15 14.93,16.26 v17.37,13.82
GND  (via drill 0.15, 0.25, 0.3, 0.51)
  Top 0.254: C2.2 v21.18,23.32 | C8.2 v18.44,16.31 | U1.COM4 U1.COM3 | U1.COM3 U1.COM2 13.62,23.8 | 13.62,23.8 13.48,23.6 U1.NC2 U1.COM1 U1.ST U1.NC1 10.54,25.58 U1.NC6 9.88,26.05 C3.2 9.63,26.09 v9.24,25.5 | 13.73,23.82 13.62,23.8 | v12.53,28.46 13.26,29.53 C4.1 13.84,30 14.3,30.09 15.82,29.06 15.89,28.71 15.59,28.27 C5.1 | C6.1 15.23,24.14 U1.COM3
  Bottom 0.102: AMP_A.B3 19.91,22.15 | AMP_A.B8 17.17,22.1 v17.37,21.9 | AMP_A.B22 13.97,22.1 13.77,21.9 v13.61,21.9 | AMP_B.B3 19.71,17.48 | AMP_B.B8 22.45,17.48 v22.25,17.68 | C7.2 27.58,18.59 v27.84,18.34 | AMP_B.B22 25.65,17.48 25.76,17.58 26.06,17.58 26.26,17.37 26.92,17.37 v26.98,17.32
  Bottom 0.152: R7.1 v11.58,22.05 | R6.1 v10.62,22.05 | R5.1 v9.65,22.05 | U2.7 U2.8 | 19.91,22.15 v19.91,21.95 | v13.61,20.57 13.61,21.13 C1.2 | 19.71,17.48 v19.71,17.68
  Bottom 0.254: AIN_BNB.35 AIN_BNB.34 arc90 16.26,33.83 16.26,33.33 v16.51,33.07 | AIN_BSB.35 23.37,5.59 | 23.37,5.59 AIN_BSB.34 | R4.1 v10.82,11.63 | v30.18,32.31 AIN_BNB.70 AIN_BNB.69 | v9.45,7.32 AIN_BSB.70 AIN_BSB.69 | 23.37,5.59 23.37,6.35 v23.57,6.55 | 11.74,13.21 12.07,13.54
  Bottom 0.406: AMP_B.CENTER v18.39,14.58 | v21.23,25.3 17.27,25.3 arc90 AMP_A.CENTER
  other vias: 8.38,11.46 33.48,30.63 1.17,19.51 1.17,17.73 2.18,15.95 2.44,17.73 2.69,19 2.69,21.54 1.17,21.54 1.68,23.57 2.95,23.83 2.18,26.11 2.95,27.89 10.31,3.76 11.58,2.74 14.88,1.22 16.41,0.97 18.19,0.71 19.96,0.71 21.49,0.71 23.52,0.97 26.31,1.73 24.54,1.22 27.84,2.49 29.36,3.25 27.84,4.01 30.23,4.11 27.58,6.05 28.35,6.81 27.58,8.08 28.6,8.08 27.84,9.6 27.58,11.13 27.33,12.9 30.45,4.93 30.84,5.99 29.74,9.6 31.65,8.59 29.62,12.65 30.12,14.68 27.84,15.7 12.6,1.98 2.44,20.27 2.44,24.84 29.31,35.86 28.04,36.88 24.74,38.4 23.22,38.66 21.44,38.91 19.66,38.91 18.14,38.91 16.1,38.66 13.31,37.9 15.09,38.4 11.79,37.13 10.26,36.37 27.03,37.64 6.71,33.58 6.96,31.8 5.69,32.31 9.65,30.3 10.87,30.18 27.74,28.19 26.11,27.36 30.43,23.39 30.48,21.11 30.2,17.09 35.18,25.15 32.82,25.96 33.55,32.89 18.92,38.35 20.55,38.35 22.3,38.35 19.02,1.32 17.58,1.37 20.7,1.22 22.35,1.27 10.44,2.95 35.23,8.56 34.32,7.32 36.78,11.13 37.31,27.94 35.18,26.85 35.2,31.09 4.42,31.24 7.54,13.26 2.29,14.25 9.42,4.47 10.03,9.58 17.78,12.32 28.3,12.09 31.62,5.03 8.23,4.85 7.32,5.49 6.12,6.96 5.36,7.52 4.62,8.43 4.04,9.37 3.38,10.24 2.77,11.18 2.26,12.19 2.46,13.41 3.45,11.58 5.46,14.45 7.85,14.48 8.74,14.55 10.11,17.3 1.19,16.69 1.52,15.06 11.96,14.55 5.11,10.69 5.92,9.83 5.94,11.56 6.71,10.21 5.64,31.42 3.78,30.4 2.95,28.91 2.31,27.46 1.4,25.22 0.81,22.94 0.53,20.96 0.61,18.72 1.57,13.82 31.24,35.1 32.59,34.09 33.22,33.45 30.28,35.92 28.8,36.65 17.22,38.79 9.09,19.35 12.95,14.55 32.33,33.15 31.52,34.09
  pour Route2 (isolate 0.127, no thermals): -8.13,-8.13 -8.13,47.75 47.75,47.75 47.75,-8.13
  pour Top (no thermals): 33.17,30.89 33.17,30.33 34.8,30.33 34.8,30.89
  pour Top (isolate 0.127, rank 2, no thermals): -5.59,-5.59 -5.59,45.21 45.21,45.21 45.21,-5.59
  pour Bottom (isolate 0.127, rank 2, no thermals): -10.67,-10.67 -10.67,50.29 50.29,50.29 50.29,-10.67
GND_THRU  (via drill 0.25)
  other vias: 8.99,35.26
  pour Top (no thermals): 8.79,35.26 8.79,34.09 9.19,34.09 9.19,35.26
  pour Bottom (no thermals): 8.79,35.26 8.79,33.58 9.19,33.58 9.19,35.26
MISO1+  (via drill 0.15)
  Top 0.076: DIO_TEA.18 30.8,28.41 28.4,26.01 28.4,24.28 28.63,24.05 28.63,20.55 28.4,20.32 27.38,19.3 25.65,19.3 24.38,18.03 22.35,18.03 v21.59,18.8
  Bottom 0.102: v21.59,18.8 21.54,18.85 17.68,18.85 15.19,21.34 AMP_A.B16
MISO1+_THRU  (via drill 0.15)
  Top 0.051: 11.23,31.18 DTHRU_TNA.18
  Top 0.102: DTHRU_TNA.18 11.21,33 v11.23,33.02
  Bottom 0.102: DTHRU_BNA.18 11.21,33 v11.23,33.02
MISO1-  (via drill 0.15)
  Top 0.076: DIO_TEA.17 30.84,28.81 30.68,28.65 30.68,28.5 28.14,25.96 28.14,24.21 28.45,23.9 28.45,20.86 28.14,20.56 27.3,19.71 25.57,19.71 24.14,18.29 22.48,18.29 22.1,18.67 22.1,18.92 21.84,19.18 v20.83,19.18
  Bottom 0.102: v20.83,19.18 17.65,19.18 15.39,21.44 AMP_A.B15
MISO1-_THRU  (via drill 0.15)
  Top 0.051: 10.82,31.18 DTHRU_TNA.17
  Top 0.102: DTHRU_TNA.17 v10.81,32.66 v10.82,32.66
  Bottom 0.102: DTHRU_BNA.17 v10.81,32.66 v10.82,32.66
MISO2+  (via drill 0.15)
  Top 0.076: DIO_TEA.20 30.86,27.61 28.91,25.65 28.91,24.44 29.03,24.31 29.03,19.33 v28.55,18.85
  Bottom 0.102: AMP_B.B16 24.44,17.93 24.69,18.19 25.25,18.19 25.71,18.64 25.71,18.85 25.91,19.05 27.58,19.05 27.79,18.85 v28.55,18.85
MISO2+_THRU  (via drill 0.15)
  Top 0.102: DTHRU_TNA.20 12.01,32.99 v12.04,33.02
  Bottom 0.102: DTHRU_BNA.20 12.01,32.99 v12.04,33.02
MISO2-  (via drill 0.15)
  Top 0.076: DIO_TEA.19 30.86,28.01 28.65,25.81 28.65,24.41 28.85,24.21 28.85,20.07 28.65,19.86 v28.09,19.3
  Bottom 0.102: AMP_B.B15 24.23,18.14 24.54,18.44 25.15,18.44 25.4,18.69 25.4,19 25.71,19.3 v28.09,19.3
MISO2-_THRU  (via drill 0.15)
  Top 0.051: 11.63,31.18 DTHRU_TNA.19
  Top 0.102: DTHRU_TNA.19 11.61,32.64 v11.63,32.66
  Bottom 0.102: DTHRU_BNA.19 11.61,32.64 v11.63,32.66
MOSI+  (via drill 0.15)
  Top 0.051: R3.2 27.58,21.93
  Top 0.076: DIO_TEA.16 30.69,29.21 30.53,29.06 30.53,28.55 27.48,25.5 27.48,22.3 27.84,21.95 R3.2 | 27.57,22.01 R3.2 | 27.64,21.95 R3.2
  Top 0.102: 26.81,20.12 v26.77,20.12 27.89,21.23 R3.2
  Bottom 0.102: AMP_A.B14 15.65,21.5 17.59,19.56 22.25,19.56 22.71,20.02 25.04,20.02 | AMP_B.B14 23.98,18.39 24.28,18.69 24.94,18.69 25.04,18.8 25.04,20.02 | 25.04,20.02 26.67,20.02 arc90 v26.77,20.12
MOSI+_THRU  (via drill 0.15)
  Top 0.051: 10.41,31.18 DTHRU_TNA.16
  Top 0.102: DTHRU_TNA.16 v10.41,33.02
  Bottom 0.102: DTHRU_BNA.16 v10.41,33.02
MOSI-  (via drill 0.15)
  Top 0.051: R3.1 26.77,21.93
  Top 0.076: DIO_TEA.15 30.58,29.61 30.38,29.41 30.38,28.6 27.25,25.48 27.25,22.38 R3.1 | 26.78,21.96 R3.1 | 26.77,21.95 R3.1
  Top 0.102: v24.74,19.66 24.74,20.17 24.89,20.32 25.86,20.32 v26.01,20.47 26.82,21.29 R3.1
  Bottom 0.102: AMP_A.B13 15.9,21.55 17.49,19.96 22.3,19.96 22.66,20.32 25.86,20.32 v26.01,20.47 | v24.74,19.66 24.74,19.1 24.54,18.9 24.03,18.9 23.72,18.59 AMP_B.B13
MOSI-_THRU  (via drill 0.15)
  Top 0.051: 10.01,31.18 DTHRU_TNA.15
  Top 0.102: DTHRU_TNA.15 v10.01,32.66
  Bottom 0.102: DTHRU_BNA.15 v10.01,32.66
N$1
  Bottom 0.102: AMP_B.B19 25.04,17.68 25.96,18.59 C7.1
N$2
  Bottom 0.051: AMP_A.30 17.17,29.62 16.86,29.93 AIN_BNB.38
N$3
  Bottom 0.051: AMP_A.29 AIN_BNB.39
N$4
  Bottom 0.051: 17.68,31.55 17.66,31.57 AIN_BNB.40 17.66,31.02 17.37,30.73 AMP_A.28
N$5
  Bottom 0.051: AIN_BNB.41 18.06,30.96 17.98,30.89 17.68,30.89 17.48,30.68 AMP_A.27
N$6
  Bottom 0.051: 18.34,30.84 18.29,30.79 17.78,30.79 17.58,30.58 AMP_A.26
  Bottom 0.102: AIN_BNB.42 18.46,30.96 18.34,30.84
N$7
  Bottom 0.051: 17.12,34.8 17.07,34.85 15.65,34.85 15.49,34.7 15.49,30.84 16.87,29.46 AMP_A.33
  Bottom 0.102: AIN_BNB.32 17.26,34.66 17.12,34.8
N$8
  Bottom 0.051: 17.42,34.9 17.37,34.95 15.6,34.95 15.39,34.75 15.39,30.79 16.76,29.41 AMP_A.34
  Bottom 0.102: AIN_BNB.31 17.66,34.66 17.42,34.9
N$9
  Bottom 0.051: 17.73,35 17.68,35.05 15.55,35.05 15.29,34.8 15.29,30.73 16.66,29.36 AMP_A.35
  Bottom 0.102: AIN_BNB.30 18.06,34.67 17.73,35
N$10
  Bottom 0.051: 18.03,35.1 17.98,35.15 15.49,35.15 15.19,34.85 15.19,30.68 16.56,29.31 AMP_A.36
  Bottom 0.102: AIN_BNB.29 18.46,34.68 18.03,35.1
N$11
  Bottom 0.051: AMP_B.30 22.45,10.01 22.76,9.7 AIN_BSB.38
N$12
  Bottom 0.051: 18.34,35.2 18.29,35.26 15.44,35.26 15.09,34.9 15.09,30.63 16.46,29.26 AMP_A.37
  Bottom 0.102: AIN_BNB.28 18.86,34.68 18.34,35.2
N$13
  Bottom 0.051: 18.64,35.31 18.59,35.36 15.39,35.36 14.99,34.95 14.99,30.58 16.36,29.21 AMP_A.38
  Bottom 0.102: AIN_BNB.27 19.26,34.69 18.64,35.31
N$14
  Bottom 0.051: 18.95,35.41 18.9,35.46 15.34,35.46 14.88,35 14.88,30.53 16.26,29.16 AMP_A.39
  Bottom 0.102: AIN_BNB.26 19.66,34.7 18.95,35.41
N$15
  Bottom 0.051: 19.2,35.51 19.15,35.56 15.29,35.56 14.78,35.05 14.78,30.48 16.15,29.11 AMP_A.40
  Bottom 0.102: AIN_BNB.25 20.06,34.65 19.2,35.51
N$16
  Bottom 0.051: 19.51,35.61 19.46,35.66 15.24,35.66 14.68,35.1 14.68,30.43 16.05,29.06 AMP_A.41
  Bottom 0.102: AIN_BNB.24 20.46,34.66 19.51,35.61
N$17
  Bottom 0.051: 19.81,35.71 19.76,35.76 15.19,35.76 14.58,35.15 14.58,30.38 15.95,29.01 AMP_A.42
  Bottom 0.102: AIN_BNB.23 20.86,34.66 19.81,35.71
N$18
  Bottom 0.051: 20.12,35.81 20.07,35.87 15.14,35.87 14.48,35.2 14.48,30.33 15.85,28.96 AMP_A.43
  Bottom 0.102: AIN_BNB.22 21.26,34.67 20.12,35.81
N$19
  Bottom 0.051: 20.42,35.92 20.37,35.97 15.09,35.97 14.38,35.26 14.38,30.28 15.75,28.91 AMP_A.44
  Bottom 0.102: AIN_BNB.21 21.66,34.68 20.42,35.92
N$20
  Bottom 0.051: 20.73,36.02 20.68,36.07 15.04,36.07 14.28,35.31 14.28,30.23 15.65,28.85 AMP_A.45
  Bottom 0.102: AIN_BNB.20 22.06,34.68 20.73,36.02
N$21
  Bottom 0.051: 21.03,36.12 20.98,36.17 14.99,36.17 14.17,35.36 14.17,30.18 15.55,28.8 AMP_A.46
  Bottom 0.102: AIN_BNB.19 22.46,34.69 21.03,36.12
N$22
  Bottom 0.051: 21.34,36.22 21.29,36.27 14.94,36.27 14.07,35.41 14.07,30.12 15.44,28.75 AMP_A.47
  Bottom 0.102: AIN_BNB.18 22.86,34.7 21.34,36.22
N$23
  Bottom 0.051: 21.59,36.32 21.54,36.37 14.88,36.37 13.97,35.46 13.97,30.07 15.34,28.7 AMP_A.48
  Bottom 0.102: AIN_BNB.17 23.26,34.65 21.59,36.32
N$24
  Bottom 0.051: 21.9,36.42 21.84,36.47 14.83,36.47 13.87,35.51 13.87,30.02 15.24,28.65 AMP_A.49
  Bottom 0.102: AIN_BNB.16 23.66,34.66 21.9,36.42
N$25
  Bottom 0.051: 22.2,36.53 22.15,36.58 14.78,36.58 13.77,35.56 13.77,29.97 15.14,28.6 AMP_A.50
  Bottom 0.102: AIN_BNB.15 24.06,34.66 22.2,36.53
N$26
  Bottom 0.051: 22.5,36.63 22.45,36.68 14.73,36.68 13.67,35.61 13.67,29.92 15.04,28.55 AMP_A.51
  Bottom 0.102: AIN_BNB.14 24.46,34.67 22.5,36.63
N$27
  Bottom 0.051: 22.81,36.73 22.76,36.78 14.68,36.78 13.56,35.66 13.56,29.87 14.94,28.5 AMP_A.52
  Bottom 0.102: AIN_BNB.13 24.86,34.68 22.81,36.73
N$28
  Bottom 0.051: 23.11,36.83 23.06,36.88 14.63,36.88 13.46,35.71 13.46,29.82 14.83,28.45 AMP_A.53
  Bottom 0.102: AIN_BNB.12 25.26,34.68 23.11,36.83
N$29
  Bottom 0.051: 23.42,36.93 23.37,36.98 14.58,36.98 13.36,35.76 13.36,29.77 14.73,28.4 AMP_A.54
  Bottom 0.102: AIN_BNB.11 25.66,34.69 23.42,36.93
N$30
  Bottom 0.051: 23.72,37.03 23.67,37.08 14.53,37.08 13.26,35.81 13.26,29.72 14.63,28.35 AMP_A.55
  Bottom 0.102: AIN_BNB.10 26.06,34.7 | 26.06,34.7 | 26.06,34.7 23.72,37.03
N$31
  Bottom 0.051: 23.98,37.14 23.93,37.19 14.48,37.19 13.16,35.87 13.16,29.67 14.53,28.3 AMP_A.56
  Bottom 0.102: AIN_BNB.9 26.46,34.65 23.98,37.14
N$32
  Bottom 0.051: 24.28,37.24 24.23,37.29 14.43,37.29 13.06,35.92 13.06,29.62 14.43,28.25 AMP_A.57
  Bottom 0.102: AIN_BNB.8 26.86,34.66 24.28,37.24
N$33
  Bottom 0.051: 24.59,37.34 24.54,37.39 14.38,37.39 12.95,35.97 12.95,29.57 14.33,28.19 AMP_A.58
  Bottom 0.102: AIN_BNB.7 27.26,34.66 24.59,37.34
N$34
  Bottom 0.051: 24.89,37.44 24.84,37.49 14.33,37.49 12.85,36.02 12.85,29.52 14.22,28.14 AMP_A.59
  Bottom 0.102: AIN_BNB.6 27.66,34.67 24.89,37.44
N$35
  Bottom 0.051: AMP_B.29 AIN_BSB.39
N$36
  Bottom 0.051: AMP_B.28 22.25,8.89 21.96,8.6 AIN_BSB.40
N$37
  Bottom 0.051: AMP_B.27 22.15,8.94 21.95,8.74 21.64,8.74 21.56,8.66 AIN_BSB.41
N$38
  Bottom 0.051: AMP_B.26 22.05,9.04 21.84,8.84 21.34,8.84 21.29,8.79
  Bottom 0.102: AIN_BSB.42 21.16,8.67 21.29,8.79
N$39
  Bottom 0.051: AMP_B.25 21.95,9.14 21.74,8.94 21.03,8.94 20.98,8.89
  Bottom 0.102: AIN_BSB.43 20.76,8.67 20.98,8.89
N$40
  Bottom 0.051: AMP_B.24 21.84,9.25 21.64,9.04 20.73,9.04 20.68,8.99
  Bottom 0.102: AIN_BSB.44 20.36,8.68 20.68,8.99
N$41
  Bottom 0.051: 25.2,37.54 25.15,37.59 14.28,37.59 12.75,36.07 12.75,29.46 14.12,28.09 AMP_A.60
  Bottom 0.102: AIN_BNB.5 28.06,34.68 25.2,37.54
N$42
  Bottom 0.102: AMP_A.B19 14.58,21.3 C1.1
N$43
  Bottom 0.051: 25.5,37.64 25.45,37.69 14.22,37.69 12.65,36.12 12.65,29.41 14.02,28.04 AMP_A.61
  Bottom 0.102: AIN_BNB.4 28.46,34.68 25.5,37.64
N$44
  Bottom 0.051: 25.81,37.74 25.76,37.8 14.17,37.8 12.55,36.17 12.55,29.36 13.92,27.99 AMP_A.62 13.92,27.94
  Bottom 0.102: AIN_BNB.3 28.86,34.69 25.81,37.74
N$45
  Bottom 0.051: 26.11,37.85 26.06,37.9 14.12,37.9 12.45,36.22 12.45,29.31 13.82,27.94 AMP_A.63
  Bottom 0.102: AIN_BNB.2 29.26,34.7 26.11,37.85
N$46
  Bottom 0.051: AIN_BNB.33 16.86,34.65 16.76,34.75 15.7,34.75 15.6,34.65 15.6,30.89 16.97,29.52 AMP_A.32
N$47
  Bottom 0.051: AMP_B.23 21.74,9.35 21.54,9.14 20.42,9.14 20.37,9.09
  Bottom 0.102: AIN_BSB.45 19.96,8.69 20.37,9.09
N$48
  Bottom 0.051: AMP_B.22 21.64,9.45 21.44,9.25 20.12,9.25 20.07,9.2
  Bottom 0.102: AIN_BSB.46 19.56,8.69 20.07,9.2
N$49
  Bottom 0.051: AMP_B.21 21.54,9.55 21.34,9.35 19.81,9.35 19.76,9.3
  Bottom 0.102: AIN_BSB.47 19.16,8.7 19.76,9.3
N$50
  Bottom 0.051: AMP_B.20 21.44,9.65 21.23,9.45 19.56,9.45 19.51,9.4
  Bottom 0.102: AIN_BSB.48 18.76,8.66 19.51,9.4
N$51
  Bottom 0.051: AMP_B.19 21.34,9.75 21.13,9.55 19.25,9.55 19.2,9.5
  Bottom 0.102: AIN_BSB.49 18.36,8.66 19.2,9.5
N$52
  Bottom 0.051: AMP_B.18 21.23,9.86 21.03,9.65 18.95,9.65 18.9,9.6
  Bottom 0.102: AIN_BSB.50 17.96,8.67 18.9,9.6
N$53
  Bottom 0.051: AMP_B.17 21.13,9.96 20.93,9.75 18.64,9.75 18.59,9.7
  Bottom 0.102: AIN_BSB.51 17.56,8.67 18.59,9.7
N$54
  Bottom 0.051: AMP_B.16 21.03,10.06 20.83,9.86 18.34,9.86 18.29,9.8
  Bottom 0.102: AIN_BSB.52 17.16,8.68 18.29,9.8
N$55
  Bottom 0.051: AMP_B.15 20.93,10.16 20.73,9.96 18.03,9.96 17.98,9.91
  Bottom 0.102: AIN_BSB.53 16.76,8.69 17.98,9.91
N$56
  Bottom 0.051: AMP_B.14 20.83,10.26 20.62,10.06 17.73,10.06 17.68,10.01
  Bottom 0.102: AIN_BSB.54 16.36,8.69 17.68,10.01
N$57
  Bottom 0.051: AMP_B.13 20.73,10.36 20.52,10.16 17.42,10.16 17.37,10.11
  Bottom 0.102: AIN_BSB.55 15.96,8.7 17.37,10.11
N$58
  Bottom 0.051: AMP_B.12 20.62,10.47 20.42,10.26 17.12,10.26 17.07,10.21
  Bottom 0.102: AIN_BSB.56 15.56,8.71 17.07,10.21
N$59
  Bottom 0.051: AMP_B.11 20.52,10.57 20.32,10.36 16.82,10.36 16.76,10.31
  Bottom 0.102: AIN_BSB.57 15.16,8.71 16.76,10.31
N$60
  Bottom 0.051: AMP_B.10 20.42,10.67 20.22,10.47 16.56,10.47 16.51,10.41
  Bottom 0.102: AIN_BSB.58 14.76,8.67 16.51,10.41
N$61
  Bottom 0.051: AMP_B.9 20.32,10.77 20.12,10.57 16.26,10.57 16.21,10.52
  Bottom 0.102: AIN_BSB.59 14.36,8.67 16.21,10.52
N$62
  Bottom 0.051: AMP_B.8 20.22,10.87 20.02,10.67 15.95,10.67 15.9,10.62
  Bottom 0.102: AIN_BSB.60 13.96,8.68 15.9,10.62
N$63
  Bottom 0.051: AMP_B.7 20.12,10.97 19.91,10.77 15.65,10.77 15.6,10.72
  Bottom 0.102: AIN_BSB.61 13.56,8.69 15.6,10.72
N$64
  Bottom 0.051: AMP_B.6 20.02,11.07 19.81,10.87 15.34,10.87 15.29,10.82
  Bottom 0.102: AIN_BSB.62 13.16,8.69 15.29,10.82
N$65
  Bottom 0.051: AMP_B.5 19.91,11.18 19.71,10.97 15.04,10.97 14.99,10.92
  Bottom 0.102: AIN_BSB.63 12.76,8.7 14.99,10.92
N$66
  Bottom 0.051: AMP_B.4 19.81,11.28 19.61,11.07 14.78,11.07 14.73,11.02
  Bottom 0.102: AIN_BSB.64 12.36,8.66 14.73,11.02
N$67
  Bottom 0.051: AMP_B.3 19.71,11.38 19.51,11.18 14.48,11.18 14.43,11.13
  Bottom 0.102: AIN_BSB.65 11.96,8.66 14.43,11.13
N$68
  Bottom 0.051: AMP_B.2 19.61,11.48 19.41,11.28 14.17,11.28 14.12,11.23
  Bottom 0.102: 14.12,11.23 11.56,8.67 AIN_BSB.66
N$69
  Bottom 0.051: 13.82,11.33 13.87,11.38 19.3,11.38 19.51,11.58 AMP_B.1
  Bottom 0.102: AIN_BSB.67 11.16,8.68 13.82,11.33
N$70
  Bottom 0.051: 18.64,30.73 18.59,30.68 17.88,30.68 17.68,30.48 AMP_A.25
  Bottom 0.102: AIN_BNB.43 18.86,30.95 18.64,30.73
N$71
  Bottom 0.051: 18.95,30.63 18.9,30.58 17.98,30.58 17.78,30.38 AMP_A.24
  Bottom 0.102: AIN_BNB.44 19.26,30.94 18.95,30.63
N$72
  Bottom 0.051: 19.25,30.53 19.2,30.48 18.09,30.48 17.88,30.28 AMP_A.23
  Bottom 0.102: AIN_BNB.45 19.66,30.94 19.25,30.53
N$73
  Bottom 0.051: 19.56,30.43 19.51,30.38 18.19,30.38 17.98,30.18 AMP_A.22
  Bottom 0.102: AIN_BNB.46 20.06,30.93 19.56,30.43
N$74
  Bottom 0.051: 13.51,11.43 13.56,11.48 19.2,11.48 19.41,11.68 AMP_B.0
  Bottom 0.102: AIN_BSB.68 10.76,8.68 13.51,11.43
N$75
  Bottom 0.051: AMP_B.31 22.55,10.06 23.17,9.45 AIN_BSB.37
N$76
  Bottom 0.051: AMP_B.33 22.76,10.16 24.13,8.79 24.13,4.93 23.98,4.78 22.55,4.78 22.5,4.83
  Bottom 0.102: AIN_BSB.32 22.36,4.97 22.5,4.83
N$77
  Bottom 0.051: AMP_B.34 22.86,10.21 24.23,8.84 24.23,4.88 24.03,4.67 22.25,4.67 22.2,4.72
  Bottom 0.102: AIN_BSB.31 21.96,4.96 22.2,4.72
N$78
  Bottom 0.051: AMP_B.35 22.96,10.26 24.33,8.89 24.33,4.83 24.08,4.57 21.95,4.57 21.9,4.62
  Bottom 0.102: AIN_BSB.30 21.56,4.95 21.9,4.62
N$79
  Bottom 0.051: AMP_B.36 23.06,10.31 24.44,8.94 24.44,4.78 24.13,4.47 21.64,4.47 21.59,4.52
  Bottom 0.102: AIN_BSB.29 21.16,4.95 21.59,4.52
N$80
  Bottom 0.051: AMP_B.37 23.17,10.36 24.54,8.99 24.54,4.72 24.18,4.37 21.34,4.37 21.29,4.42
  Bottom 0.102: AIN_BSB.28 20.76,4.94 21.29,4.42
N$81
  Bottom 0.051: AMP_B.38 23.27,10.41 24.64,9.04 24.64,4.67 24.23,4.27 21.03,4.27 20.98,4.32
  Bottom 0.102: AIN_BSB.27 20.36,4.93 20.98,4.32
N$82
  Bottom 0.051: AMP_B.39 23.37,10.47 24.74,9.09 24.74,4.62 24.28,4.17 20.73,4.17 20.68,4.22
  Bottom 0.102: AIN_BSB.26 19.96,4.93 20.68,4.22
N$83
  Bottom 0.051: AMP_B.40 23.47,10.52 24.84,9.14 24.84,4.57 24.33,4.06 20.47,4.06 20.42,4.12
  Bottom 0.102: AIN_BSB.25 19.56,4.97 20.42,4.12
N$84
  Bottom 0.051: AMP_B.41 23.57,10.57 24.94,9.2 24.94,4.52 24.38,3.96 20.17,3.96 20.12,4.01
  Bottom 0.102: AIN_BSB.24 19.16,4.97 20.12,4.01
N$85
  Bottom 0.051: AMP_B.42 23.67,10.62 25.04,9.25 25.04,4.47 24.44,3.86 19.86,3.86 19.81,3.91
  Bottom 0.102: AIN_BSB.23 18.76,4.96 19.81,3.91
N$86
  Bottom 0.051: AMP_B.43 23.77,10.67 25.15,9.3 25.15,4.42 24.49,3.76 19.56,3.76 19.51,3.81
  Bottom 0.102: AIN_BSB.22 18.36,4.95 19.51,3.81
N$87
  Bottom 0.051: AMP_B.44 23.88,10.72 25.25,9.35 25.25,4.37 24.54,3.66 19.25,3.66 19.2,3.71
  Bottom 0.102: AIN_BSB.21 17.96,4.95 19.2,3.71
N$88
  Bottom 0.051: AMP_B.45 23.98,10.77 25.35,9.4 25.35,4.32 24.59,3.56 18.95,3.56 18.9,3.61
  Bottom 0.102: AIN_BSB.20 17.56,4.94 18.9,3.61
N$89
  Bottom 0.051: AMP_B.46 24.08,10.82 25.45,9.45 25.45,4.27 24.64,3.45 18.64,3.45 18.59,3.51
  Bottom 0.102: AIN_BSB.19 17.16,4.93 18.59,3.51
N$90
  Bottom 0.051: AMP_B.47 24.18,10.87 25.55,9.5 25.55,4.22 24.69,3.35 18.34,3.35 18.29,3.4
  Bottom 0.102: AIN_BSB.18 16.76,4.93 18.29,3.4
N$91
  Bottom 0.051: AMP_B.48 24.28,10.92 25.65,9.55 25.65,4.17 24.74,3.25 18.09,3.25 18.03,3.3
  Bottom 0.102: AIN_BSB.17 16.36,4.97 18.03,3.3
N$92
  Bottom 0.051: AMP_B.49 24.38,10.97 25.76,9.6 25.76,4.12 24.79,3.15 17.78,3.15 17.73,3.2
  Bottom 0.102: AIN_BSB.16 15.96,4.97 17.73,3.2
N$93
  Bottom 0.051: AMP_B.50 24.49,11.02 25.86,9.65 25.86,4.06 24.84,3.05 17.48,3.05 17.42,3.1
  Bottom 0.102: AIN_BSB.15 15.56,4.96 17.42,3.1
N$94
  Bottom 0.051: AMP_B.51 24.59,11.07 25.96,9.7 25.96,4.01 24.89,2.95 17.17,2.95 17.12,3
  Bottom 0.102: AIN_BSB.14 15.16,4.95 17.12,3
N$95
  Bottom 0.051: AMP_B.52 24.69,11.13 26.06,9.75 26.06,3.96 24.94,2.85 16.87,2.85 16.82,2.9
  Bottom 0.102: 16.82,2.9 14.76,4.95 AIN_BSB.13
N$96
  Bottom 0.051: AMP_B.53 24.79,11.18 26.16,9.8 26.16,3.91 24.99,2.74 16.56,2.74 16.51,2.79
  Bottom 0.102: AIN_BSB.12 14.36,4.94 16.51,2.79
N$97
  Bottom 0.051: AMP_B.54 24.89,11.23 26.26,9.86 26.26,3.86 25.04,2.64 16.26,2.64 16.21,2.69
  Bottom 0.102: 16.21,2.69 13.96,4.93 AIN_BSB.11
N$98
  Bottom 0.051: AMP_B.55 24.99,11.28 26.37,9.91 26.37,3.81 25.1,2.54 15.95,2.54 15.9,2.59
  Bottom 0.102: 15.9,2.59 13.56,4.93 AIN_BSB.10 | AIN_BSB.10
N$99
  Bottom 0.051: AMP_B.56 25.1,11.33 26.47,9.96 26.47,3.76 25.15,2.44 15.7,2.44 15.65,2.49
  Bottom 0.102: 15.65,2.49 13.16,4.98 AIN_BSB.9
N$100
  Bottom 0.051: AMP_B.57 25.2,11.38 26.57,10.01 26.57,3.71 25.2,2.34 15.39,2.34 15.34,2.39
  Bottom 0.102: AIN_BSB.8 12.76,4.97 15.34,2.39
N$101
  Bottom 0.051: AMP_B.58 25.3,11.43 26.67,10.06 26.67,3.66 25.25,2.23 15.09,2.23 15.04,2.29
  Bottom 0.102: AIN_BSB.7 12.36,4.96 15.04,2.29
N$102
  Bottom 0.051: AMP_B.59 25.4,11.48 26.77,10.11 26.77,3.61 25.3,2.13 14.78,2.13 14.73,2.18
  Bottom 0.102: AIN_BSB.6 11.96,4.95 14.73,2.18
N$103
  Bottom 0.051: AMP_B.60 25.5,11.53 26.87,10.16 26.87,3.56 25.35,2.03 14.48,2.03 14.43,2.08
  Bottom 0.102: AIN_BSB.5 11.56,4.95 14.43,2.08
N$104
  Bottom 0.051: AMP_B.61 25.6,11.58 26.98,10.21 26.98,3.51 25.4,1.93 14.17,1.93 14.12,1.98
  Bottom 0.102: 14.12,1.98 11.16,4.94 AIN_BSB.4
N$105
  Bottom 0.051: AMP_B.62 25.71,11.63 27.08,10.26 27.08,3.45 25.45,1.83 13.87,1.83 13.82,1.88
  Bottom 0.102: 13.82,1.88 10.77,4.93 AIN_BSB.3
N$106
  Bottom 0.051: AMP_B.63 25.81,11.68 27.18,10.31 27.18,3.4 25.5,1.73 13.56,1.73 13.51,1.78
  Bottom 0.102: 13.51,1.78 10.36,4.93 AIN_BSB.2
N$107
  Bottom 0.051: AMP_B.32 22.66,10.11 24.03,8.74 24.03,4.98 23.93,4.88 22.86,4.88 22.76,4.97 AIN_BSB.33
N$108  (via drill 0.15)
  Top 0.152: ATHRU_TEB.33 v35.26,22.76
  Bottom 0.152: v35.26,22.76 ATHRU_BEB.33
N$109  (via drill 0.15)
  Top 0.152: ATHRU_TEB.32 35.71,22.36 v35.71,22.35
  Bottom 0.152: v35.71,22.35 35.71,22.36 ATHRU_BEB.32
N$110  (via drill 0.15)
  Top 0.152: ATHRU_TEB.31 35.26,21.96 v35.26,21.95
  Bottom 0.152: v35.26,21.95 35.26,21.96 ATHRU_BEB.31
N$111  (via drill 0.15)
  Top 0.152: ATHRU_TEB.30 35.71,21.56 v35.71,21.54
  Bottom 0.152: v35.71,21.54 35.71,21.56 ATHRU_BEB.30
N$112  (via drill 0.15)
  Top 0.152: ATHRU_TEB.29 35.26,21.16 v35.26,21.13
  Bottom 0.152: v35.26,21.13 35.26,21.16 ATHRU_BEB.29
N$113  (via drill 0.15)
  Top 0.152: ATHRU_TEB.28 35.71,20.76 v35.71,20.78
  Bottom 0.152: v35.71,20.78 35.71,20.76 ATHRU_BEB.28
N$114  (via drill 0.15)
  Top 0.152: ATHRU_TEB.27 v35.26,20.36 v35.26,20.37
  Bottom 0.152: v35.26,20.37 v35.26,20.36 ATHRU_BEB.27
N$115  (via drill 0.15)
  Top 0.152: ATHRU_TEB.26 v35.71,19.96 | v35.71,19.96
  Bottom 0.152: v35.71,19.96 | v35.71,19.96 ATHRU_BEB.26
N$116  (via drill 0.15)
  Top 0.152: ATHRU_TEB.25 v35.26,19.56
  Bottom 0.152: v35.26,19.56 ATHRU_BEB.25
N$117  (via drill 0.15)
  Top 0.152: ATHRU_TEB.24 35.71,19.16 v35.71,19.15
  Bottom 0.152: v35.71,19.15 35.71,19.16 ATHRU_BEB.24
N$118  (via drill 0.15)
  Top 0.152: ATHRU_TEB.23 35.26,18.76 v35.26,18.8
  Bottom 0.152: v35.26,18.8 35.26,18.76 ATHRU_BEB.23
N$119  (via drill 0.15)
  Top 0.152: ATHRU_TEB.22 35.71,18.36 v35.71,18.39
  Bottom 0.152: v35.71,18.39 35.71,18.36 ATHRU_BEB.22
N$120  (via drill 0.15)
  Top 0.152: ATHRU_TEB.21 35.26,17.96 v35.26,17.98
  Bottom 0.152: v35.26,17.98 35.26,17.96 ATHRU_BEB.21
N$121  (via drill 0.15)
  Top 0.152: ATHRU_TEB.20 v35.71,17.56 v35.71,17.58
  Bottom 0.152: v35.71,17.58 v35.71,17.56 ATHRU_BEB.20
N$122  (via drill 0.15)
  Top 0.152: ATHRU_TEB.19 v35.26,17.16 v35.26,17.17
  Bottom 0.152: v35.26,17.17 v35.26,17.16 ATHRU_BEB.19
N$123  (via drill 0.15)
  Top 0.152: ATHRU_TEB.18 v35.71,16.76
  Bottom 0.152: v35.71,16.76 ATHRU_BEB.18
N$124  (via drill 0.15)
  Top 0.152: ATHRU_TEB.17 v35.26,16.36
  Bottom 0.152: v35.26,16.36 ATHRU_BEB.17
N$125  (via drill 0.15)
  Top 0.152: ATHRU_TEB.16 35.71,15.96 v35.71,15.95
  Bottom 0.152: v35.71,15.95 35.71,15.96 ATHRU_BEB.16
N$126  (via drill 0.15)
  Top 0.152: ATHRU_TEB.15 35.26,15.56 v35.26,15.55
  Bottom 0.152: v35.26,15.55 35.26,15.56 ATHRU_BEB.15
N$127  (via drill 0.15)
  Top 0.152: ATHRU_TEB.14 35.71,15.16 v35.71,15.14
  Bottom 0.152: v35.71,15.14 35.71,15.16 ATHRU_BEB.14
N$128  (via drill 0.15)
  Top 0.152: ATHRU_TEB.13 35.26,14.76 v35.26,14.78
  Bottom 0.152: v35.26,14.78 35.26,14.76 ATHRU_BEB.13
N$129  (via drill 0.15)
  Top 0.152: ATHRU_TEB.12 v35.71,14.36 v35.71,14.38
  Bottom 0.152: v35.71,14.38 v35.71,14.36 ATHRU_BEB.12
N$130  (via drill 0.15)
  Top 0.152: ATHRU_TEB.11 v35.26,13.96 v35.26,13.97
  Bottom 0.152: v35.26,13.97 v35.26,13.96 ATHRU_BEB.11
N$131  (via drill 0.15)
  Top 0.152: v12.09,17.78 9.98,15.67 9.98,14.2 PLATE.T1
  Bottom 0.152: R7.2 12.08,20.64 12.33,20.38 U2.11 12.33,18.02 v12.09,17.78
N$132  (via drill 0.15)
  Top 0.152: v11.68,16.82 10.41,15.55 10.41,13.79 9.88,13.26 PLATE.T2
  Bottom 0.152: R6.2 10.62,20.07 10.87,19.81 11.43,19.81 11.68,19.56 U2.10 11.68,16.87 v11.68,16.82
N$133  (via drill 0.15)
  Top 0.152: v11.07,15.65 11.07,13.52 PLATE.T3
  Bottom 0.152: R5.2 9.65,19.13 9.91,18.88 U2.9 11.03,15.79 v11.07,15.65
N$134
  Bottom 0.254: U2.5 12.98,11.99 R4.2
N$136  (via drill 0.15)
  Top 0.254: v7.62,9.04 12.7,9.04 15.58,11.93 v15.58,12.23 | PLATE.B2 v7.62,11.63
  Bottom 0.254: 15.6,13.25 U2.1 | v7.62,11.63 v7.62,9.04 | U2.13 13.63,16.59 15.58,14.64 U2.1 | v15.58,12.23 U2.1
N$137
  Bottom 0.051: 19.86,30.33 19.81,30.28 18.29,30.28 18.09,30.07 AMP_A.21
  Bottom 0.102: AIN_BNB.47 20.46,30.93 19.86,30.33
N$138
  Bottom 0.051: 20.12,30.23 20.07,30.18 18.39,30.18 18.19,29.97 AMP_A.20
  Bottom 0.102: AIN_BNB.48 20.86,30.97 20.12,30.23
N$139
  Bottom 0.051: 20.42,30.12 20.37,30.07 18.49,30.07 18.29,29.87 AMP_A.19
  Bottom 0.102: AIN_BNB.49 21.26,30.96 20.42,30.12
N$140
  Bottom 0.051: 20.73,30.02 20.68,29.97 18.59,29.97 18.39,29.77 AMP_A.18
  Bottom 0.102: AIN_BNB.50 21.66,30.96 20.73,30.02
N$141
  Bottom 0.051: 21.03,29.92 20.98,29.87 18.69,29.87 18.49,29.67 AMP_A.17